# Altium PCB SENSEI_Base-Board.PcbDoc (part 1 of 10)
Units mm, origin at the board's own origin, x right, y up, seen from the top; angles counter-clockwise.
Board outline 51.6 x 28.1 mm, 8 copper layers (Top Sig/Pwr, GND1, Sig1, GND2, Sig2, Pwr, GND3, Bot Sig/Pwr), stack 1.53 mm thick; 209 components, 201 nets, 1031 pads, 2222 vias.
Unrouted connection lines stored in the file: 214.
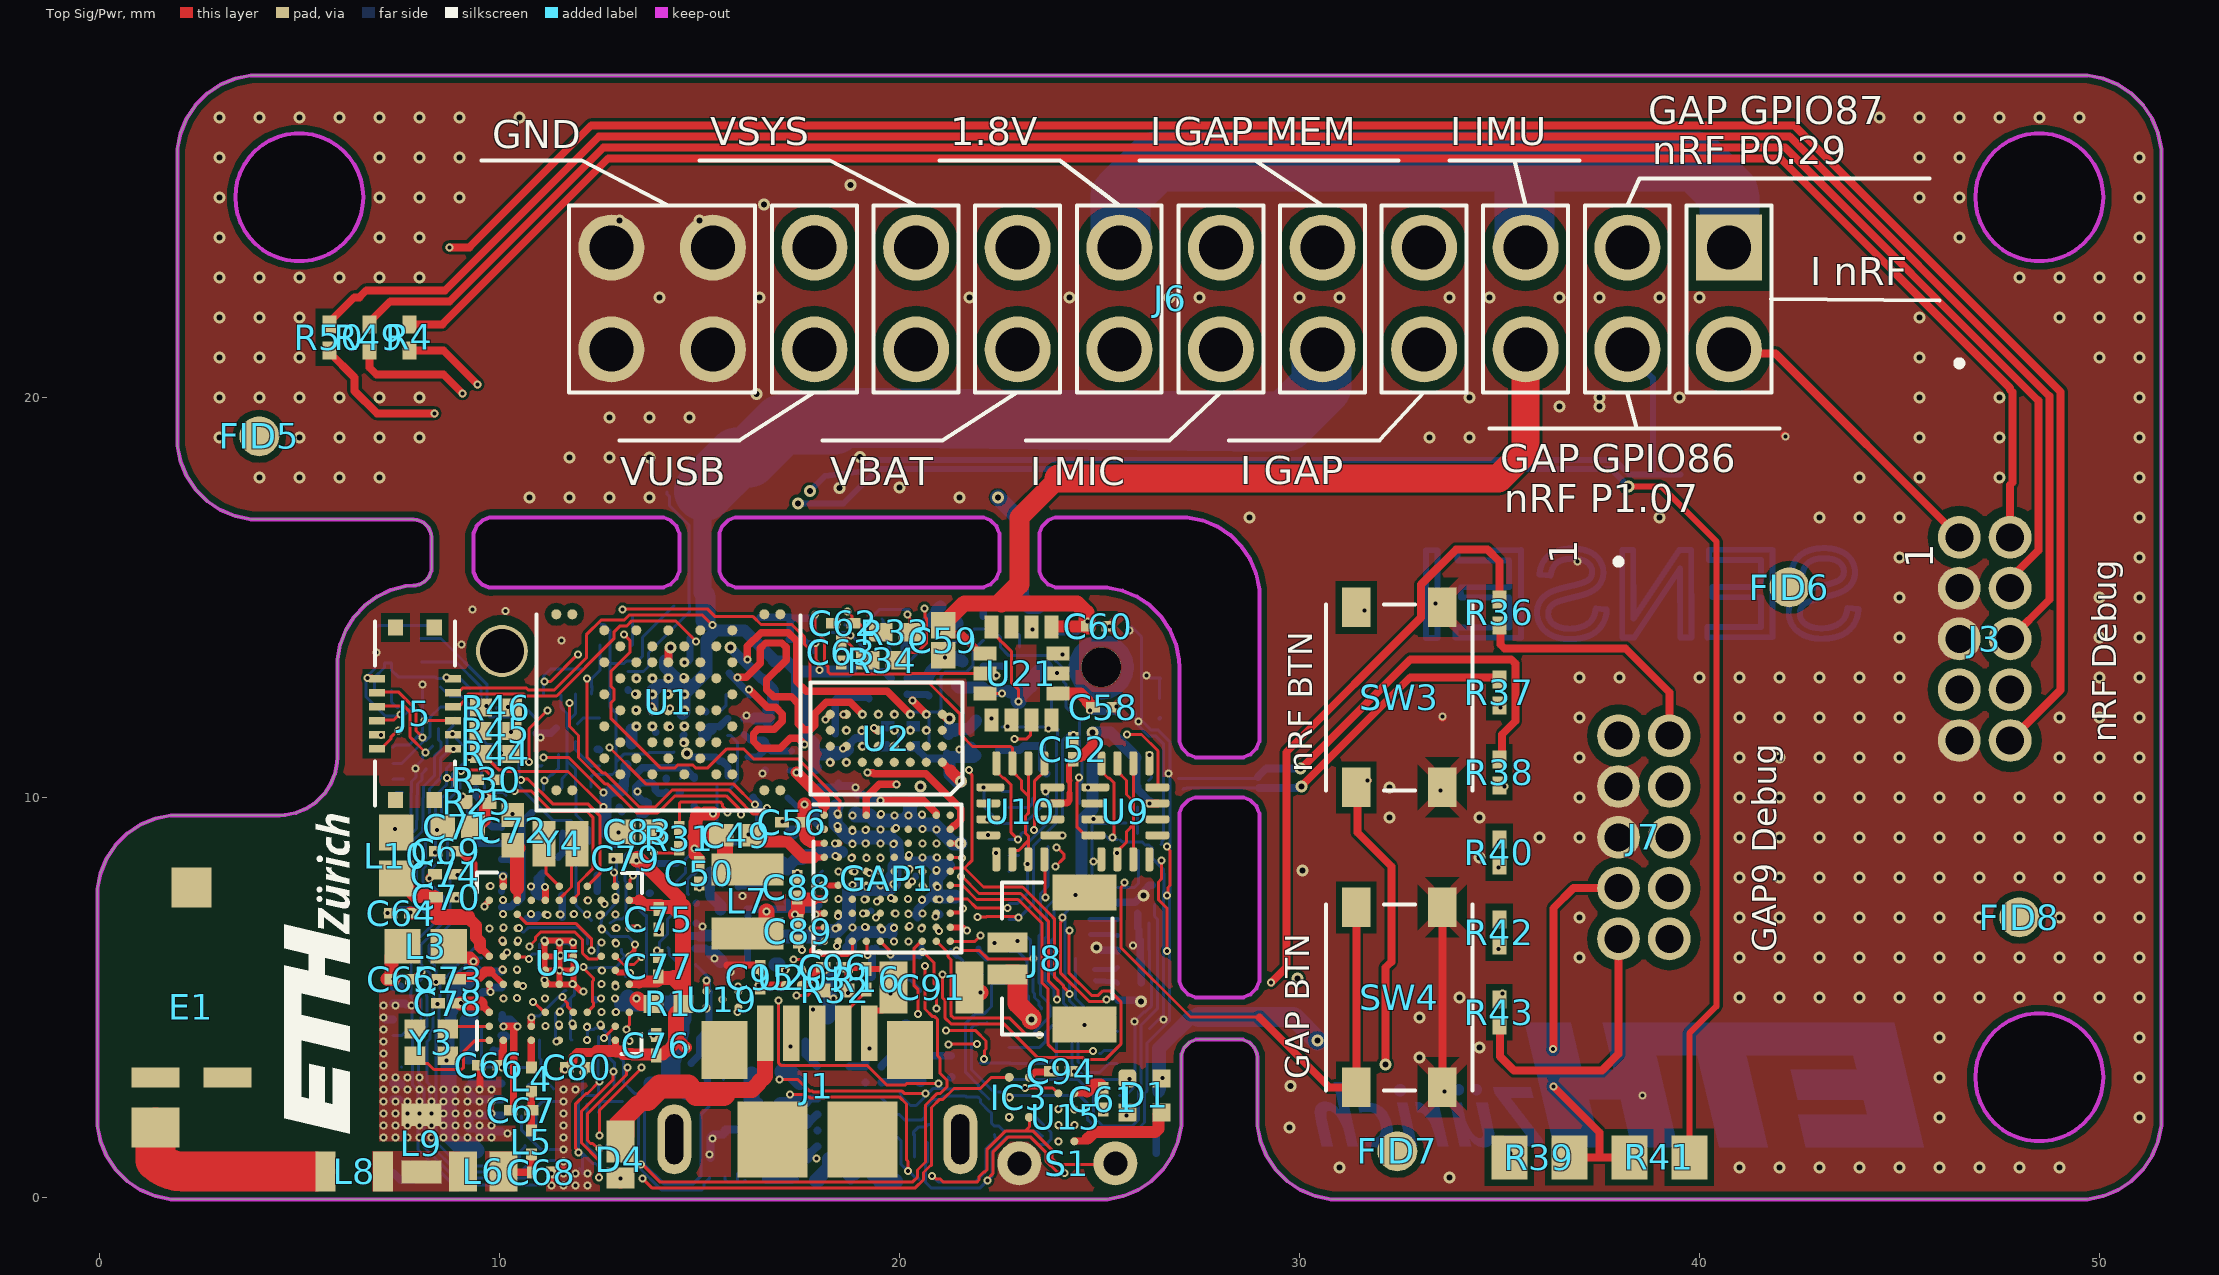
[diagram p0: Top Sig/Pwr view]
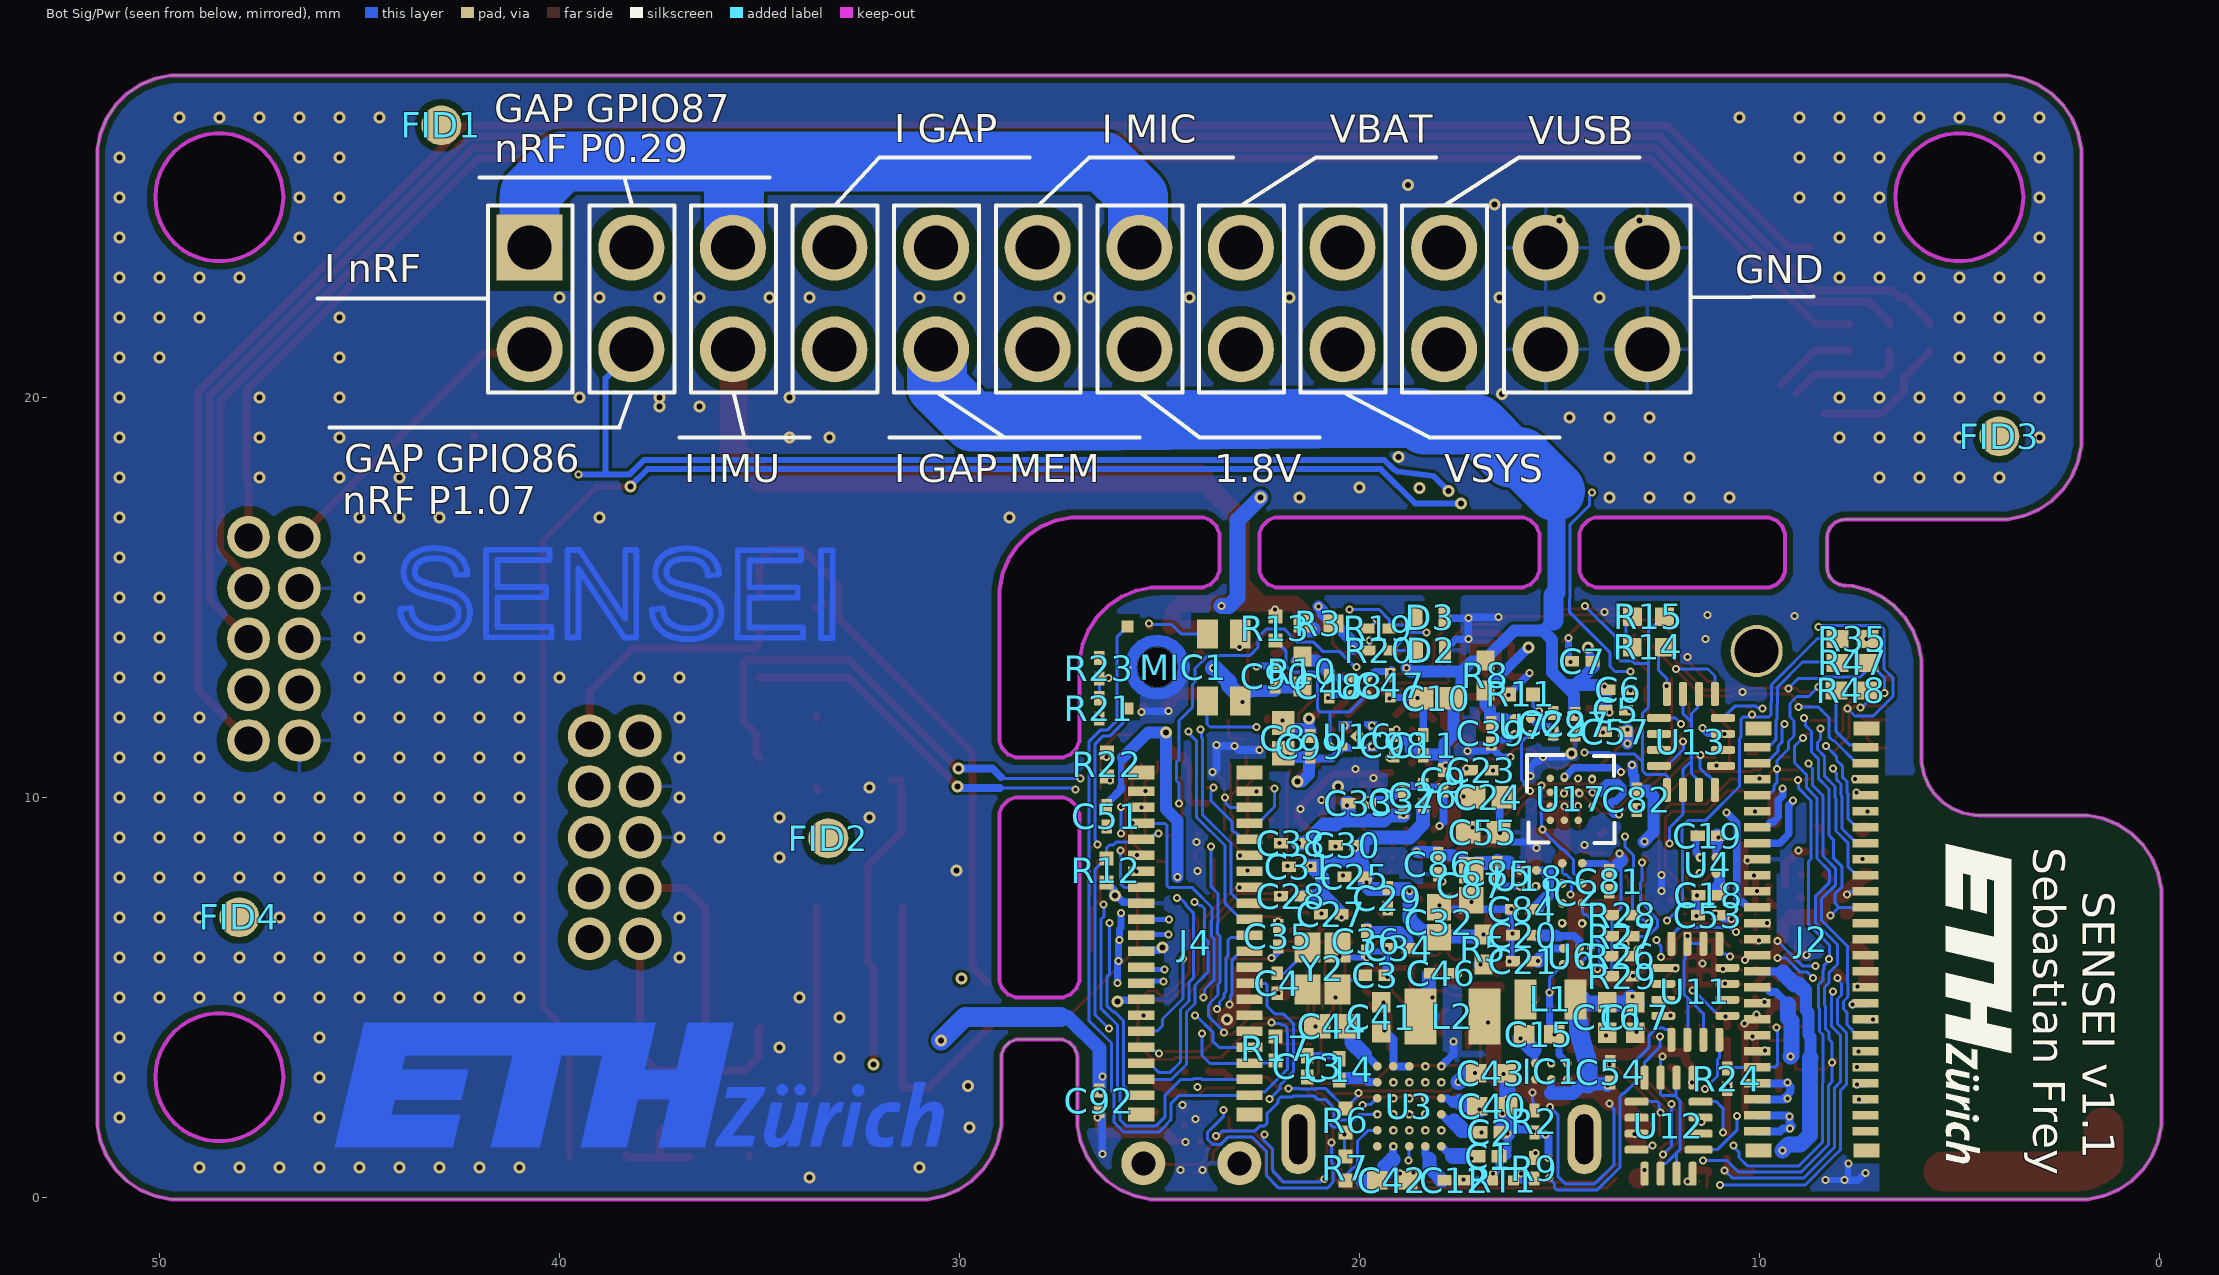
[diagram p1: Bot Sig/Pwr view, seen from below]
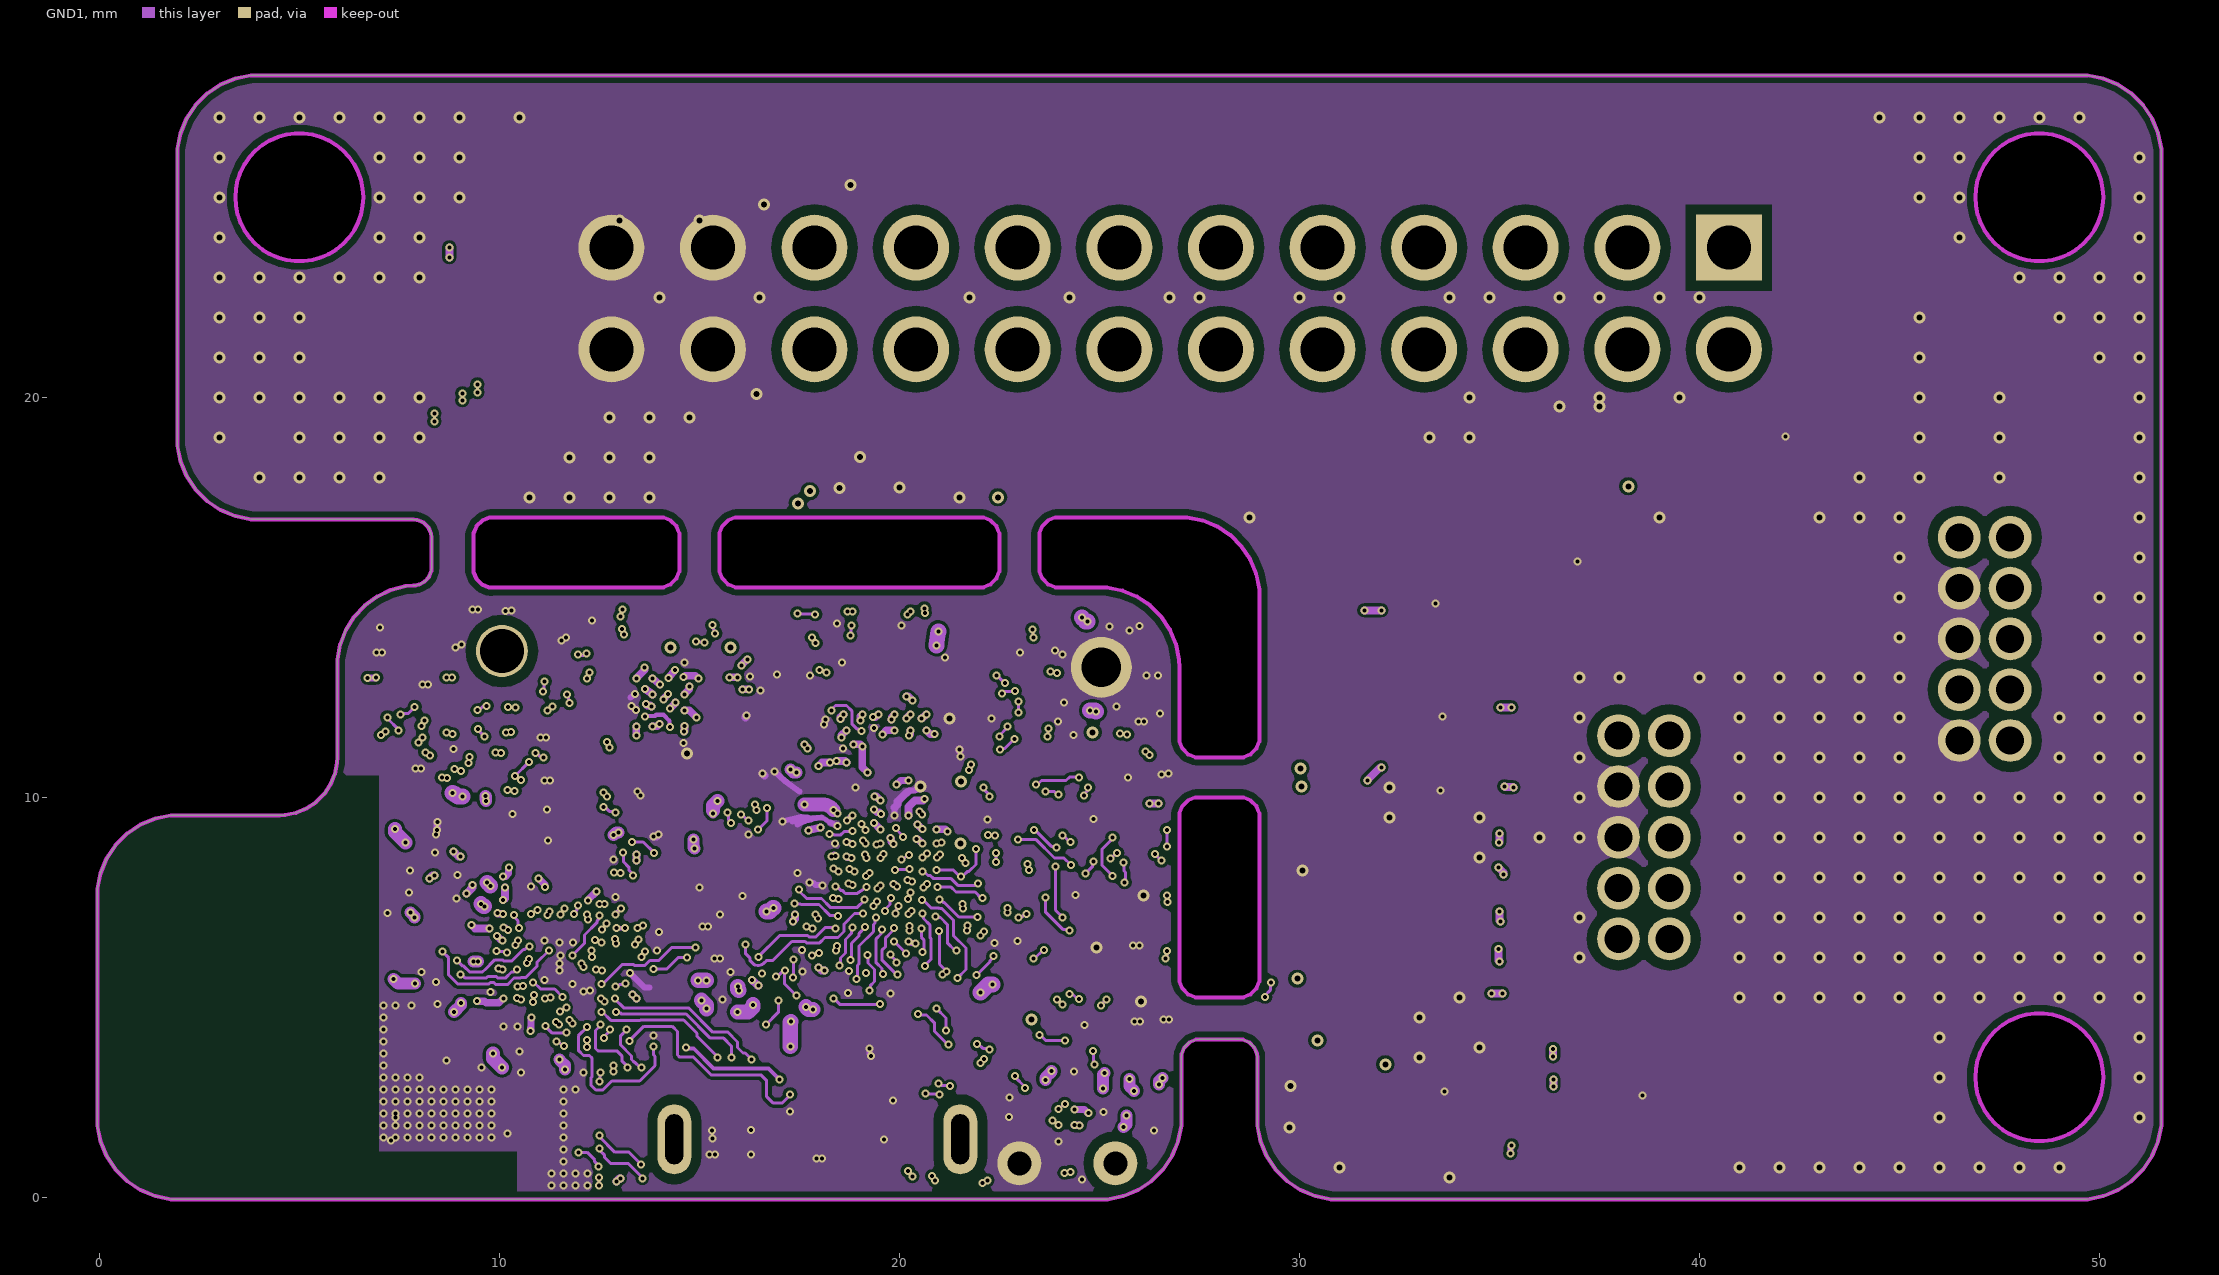
[diagram p2: GND1]
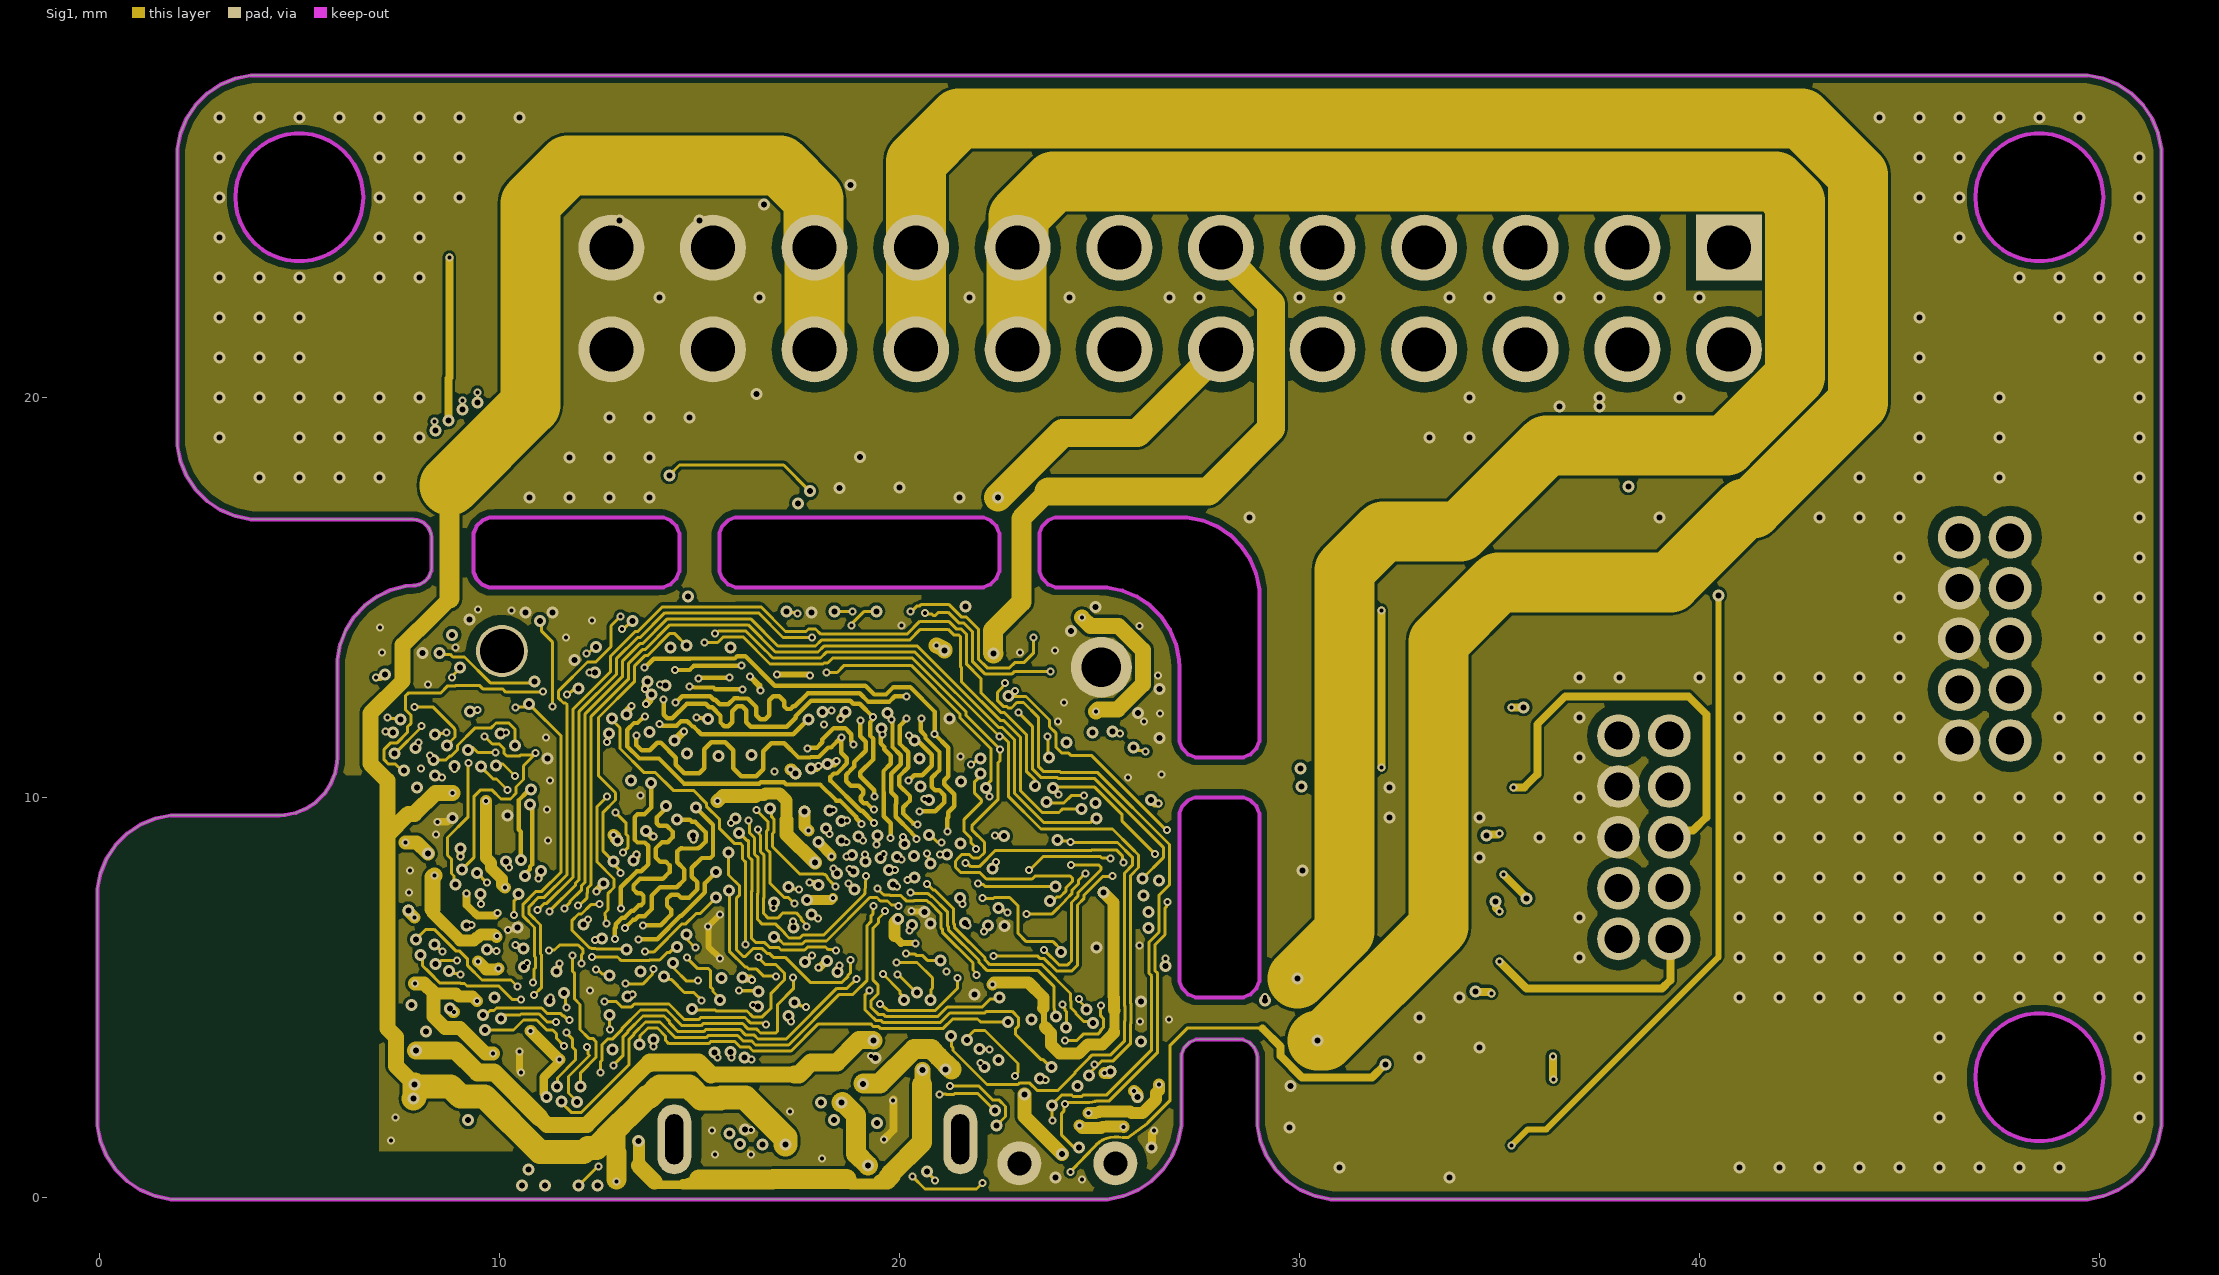
[diagram p3: Sig1]
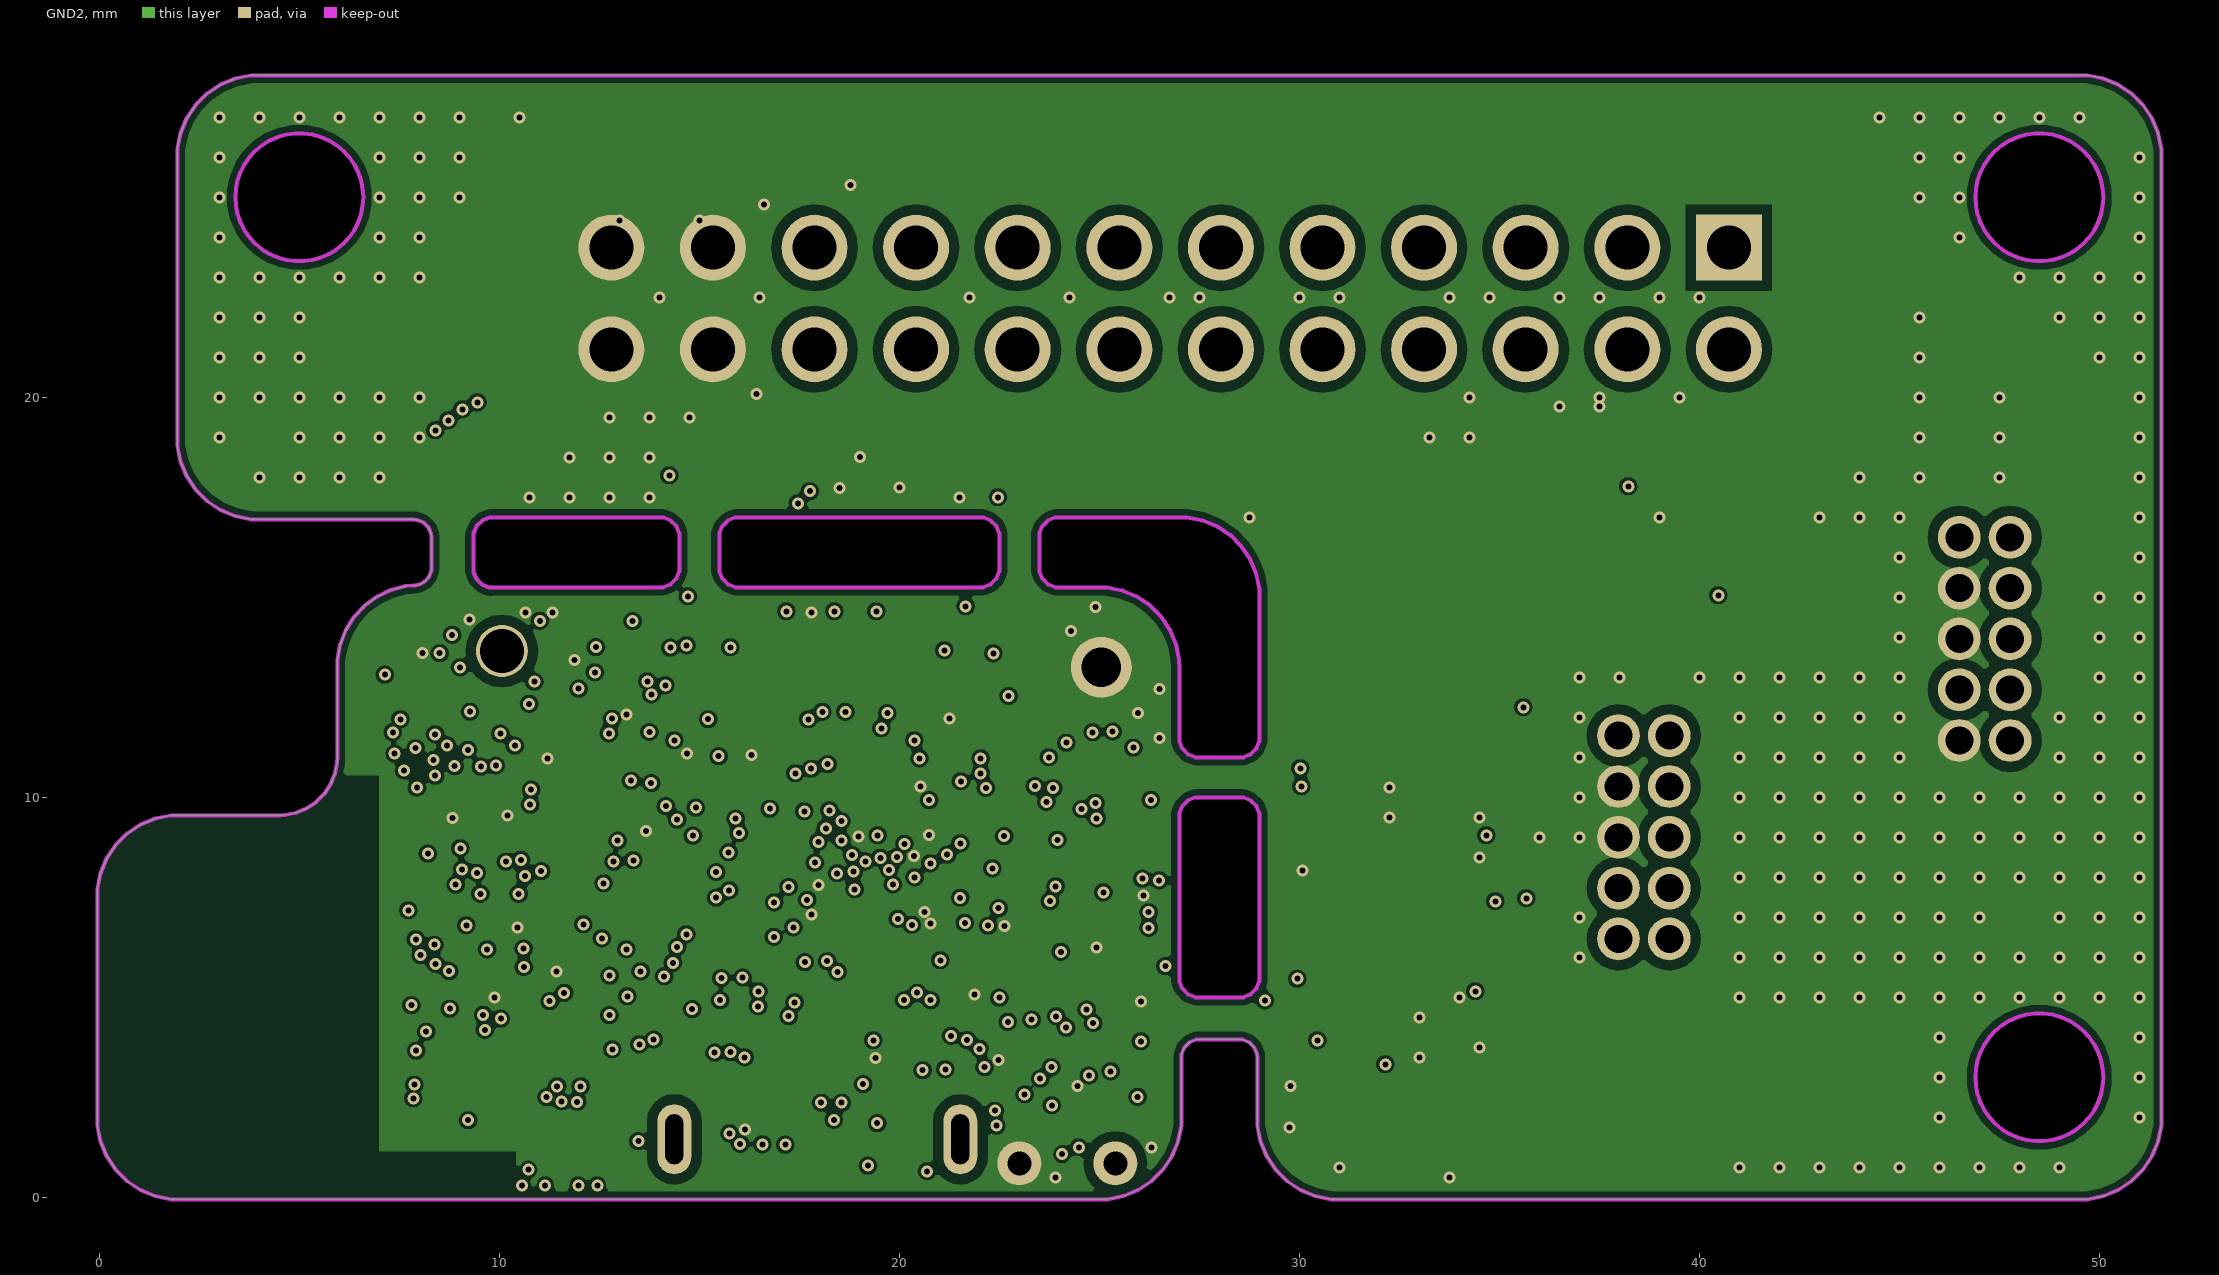
[diagram p4: GND2]
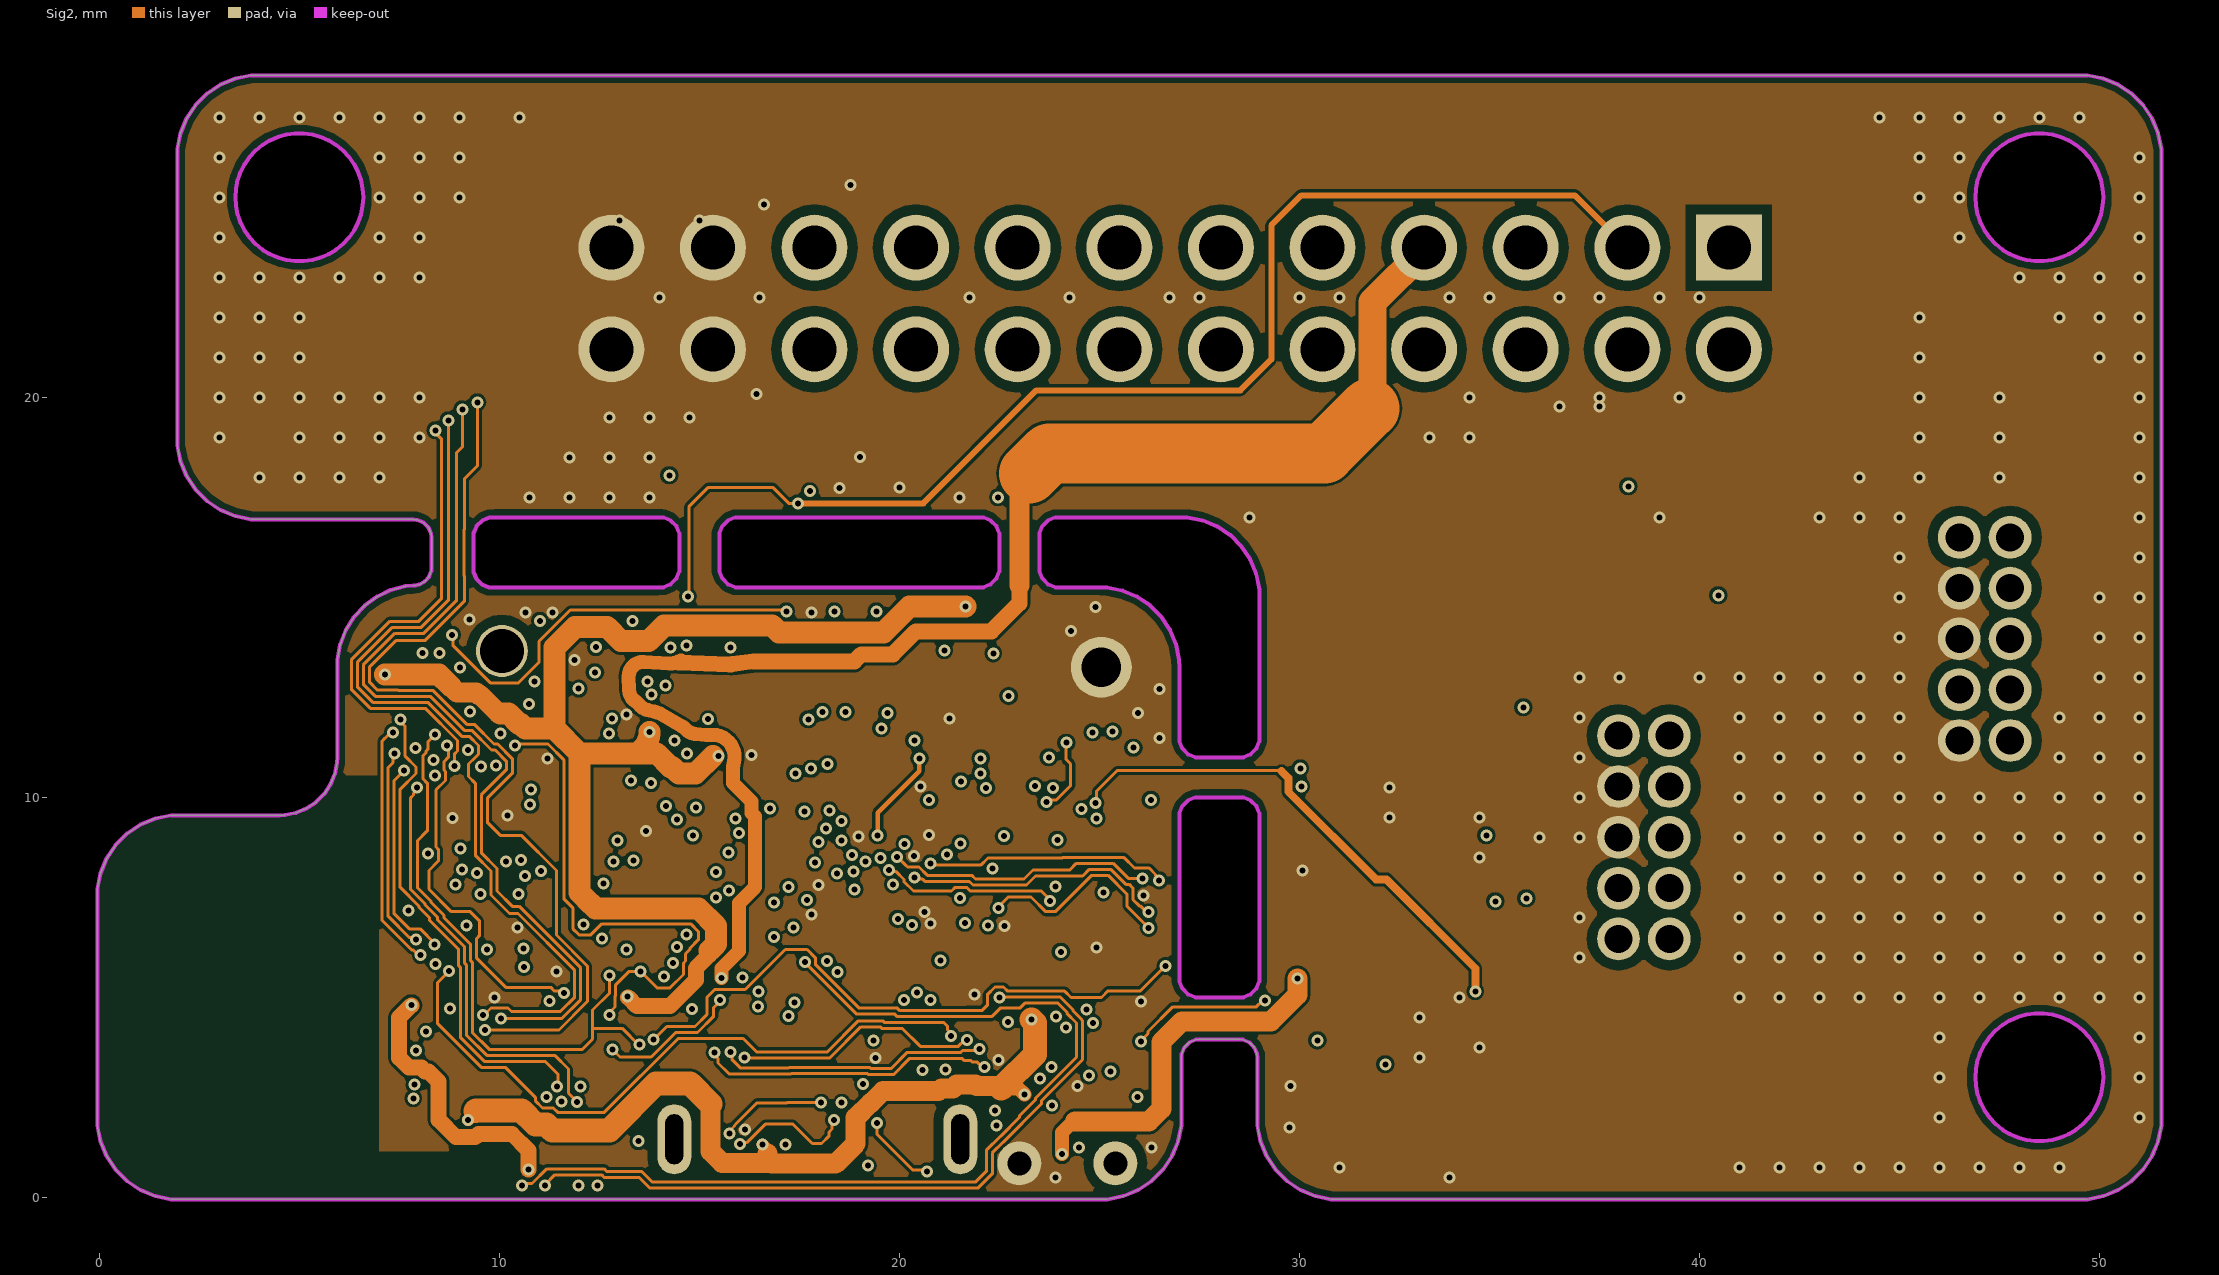
[diagram p5: Sig2]
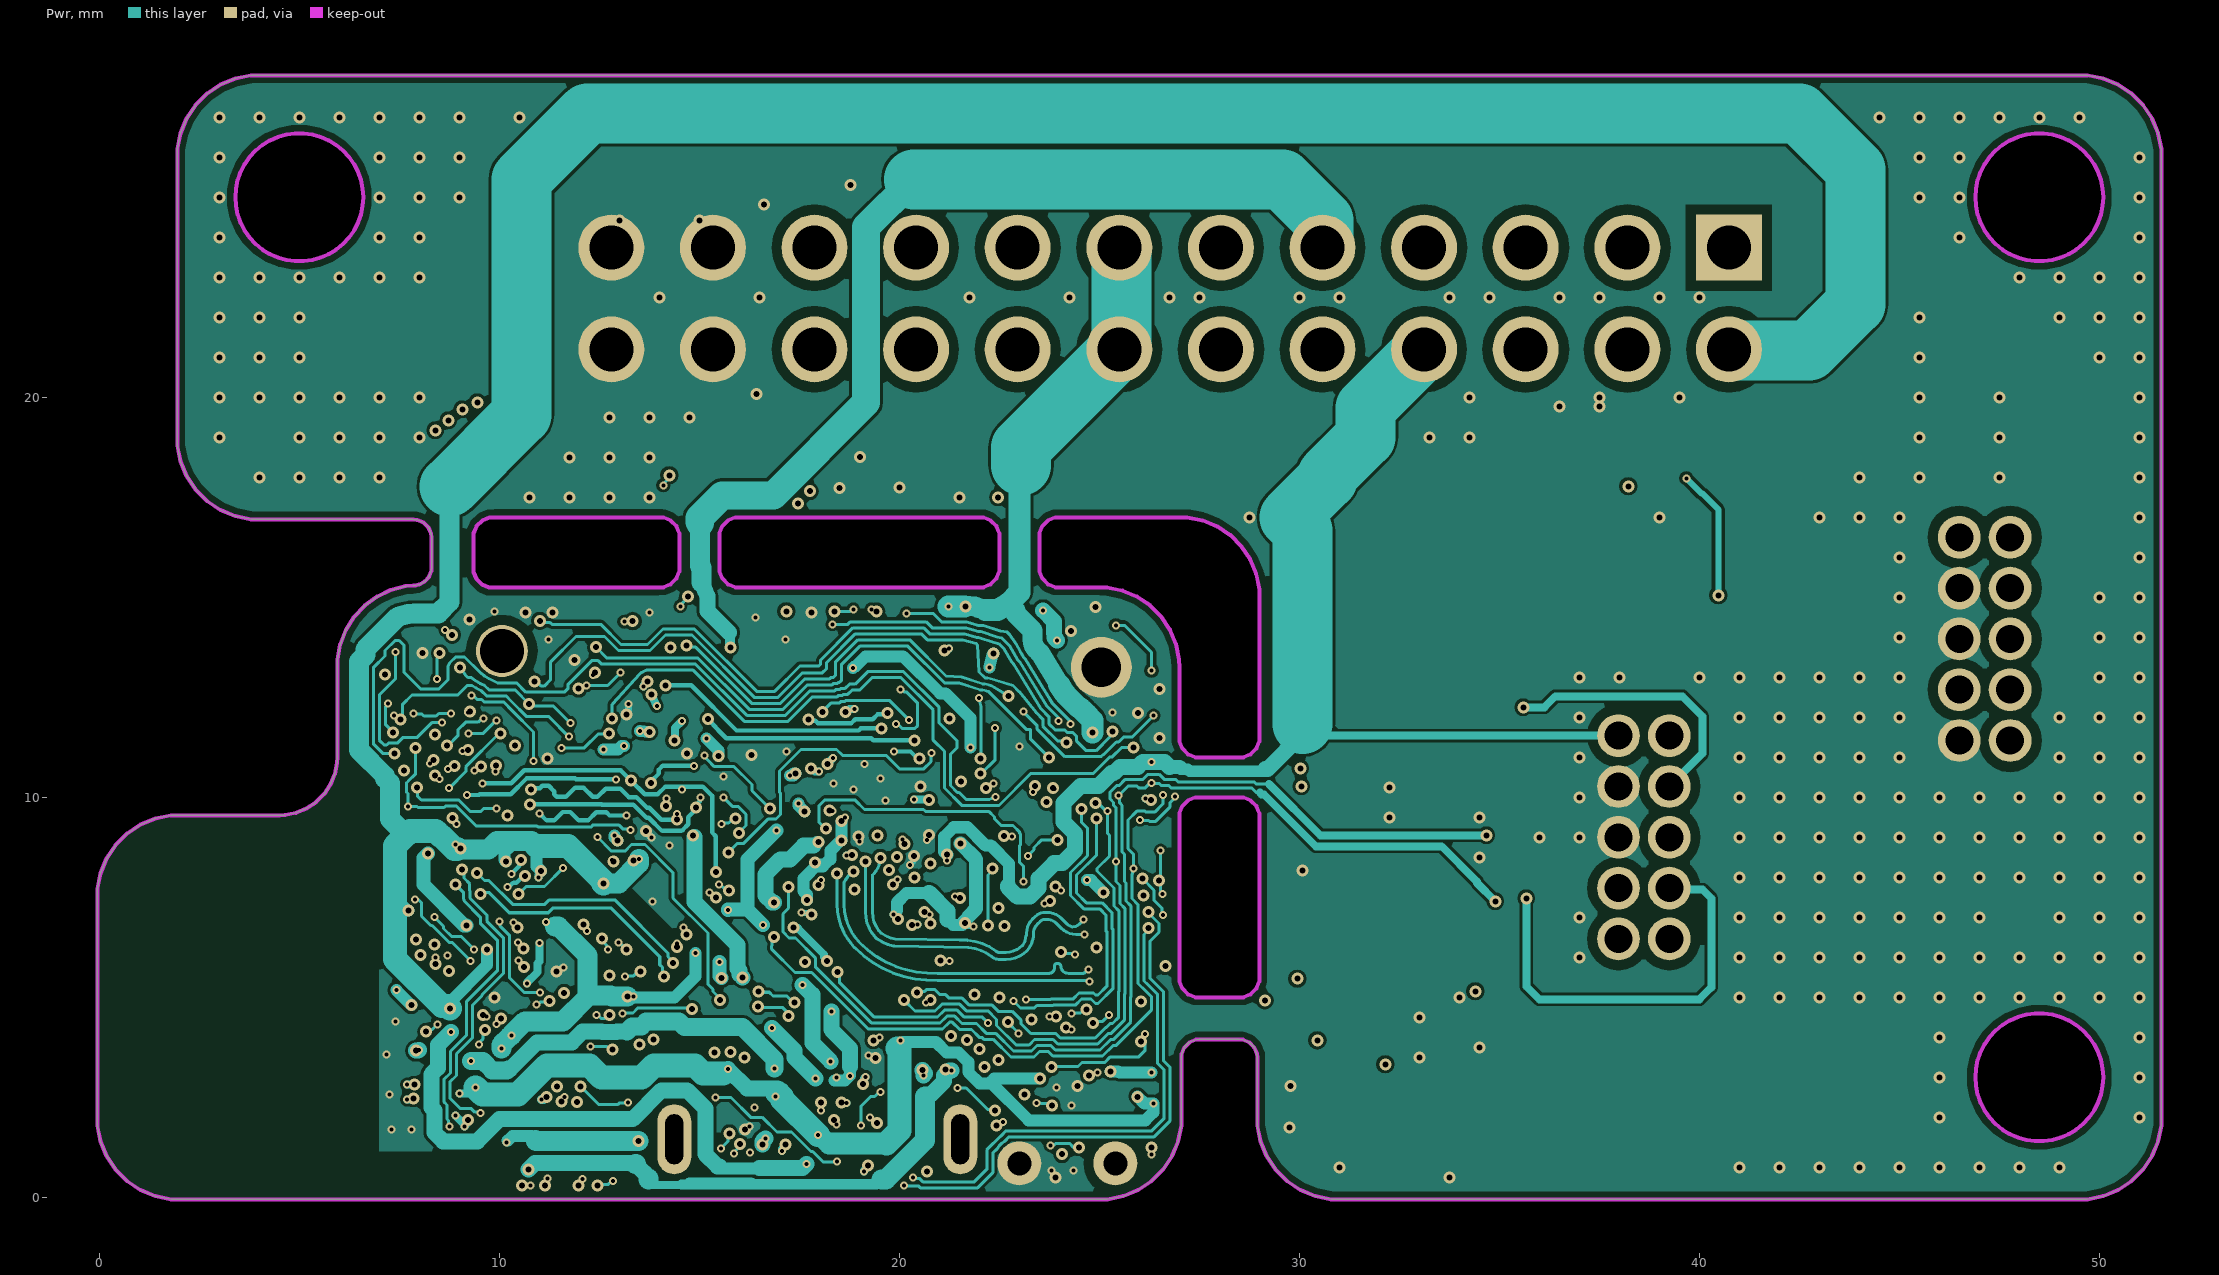
[diagram p6: Pwr]
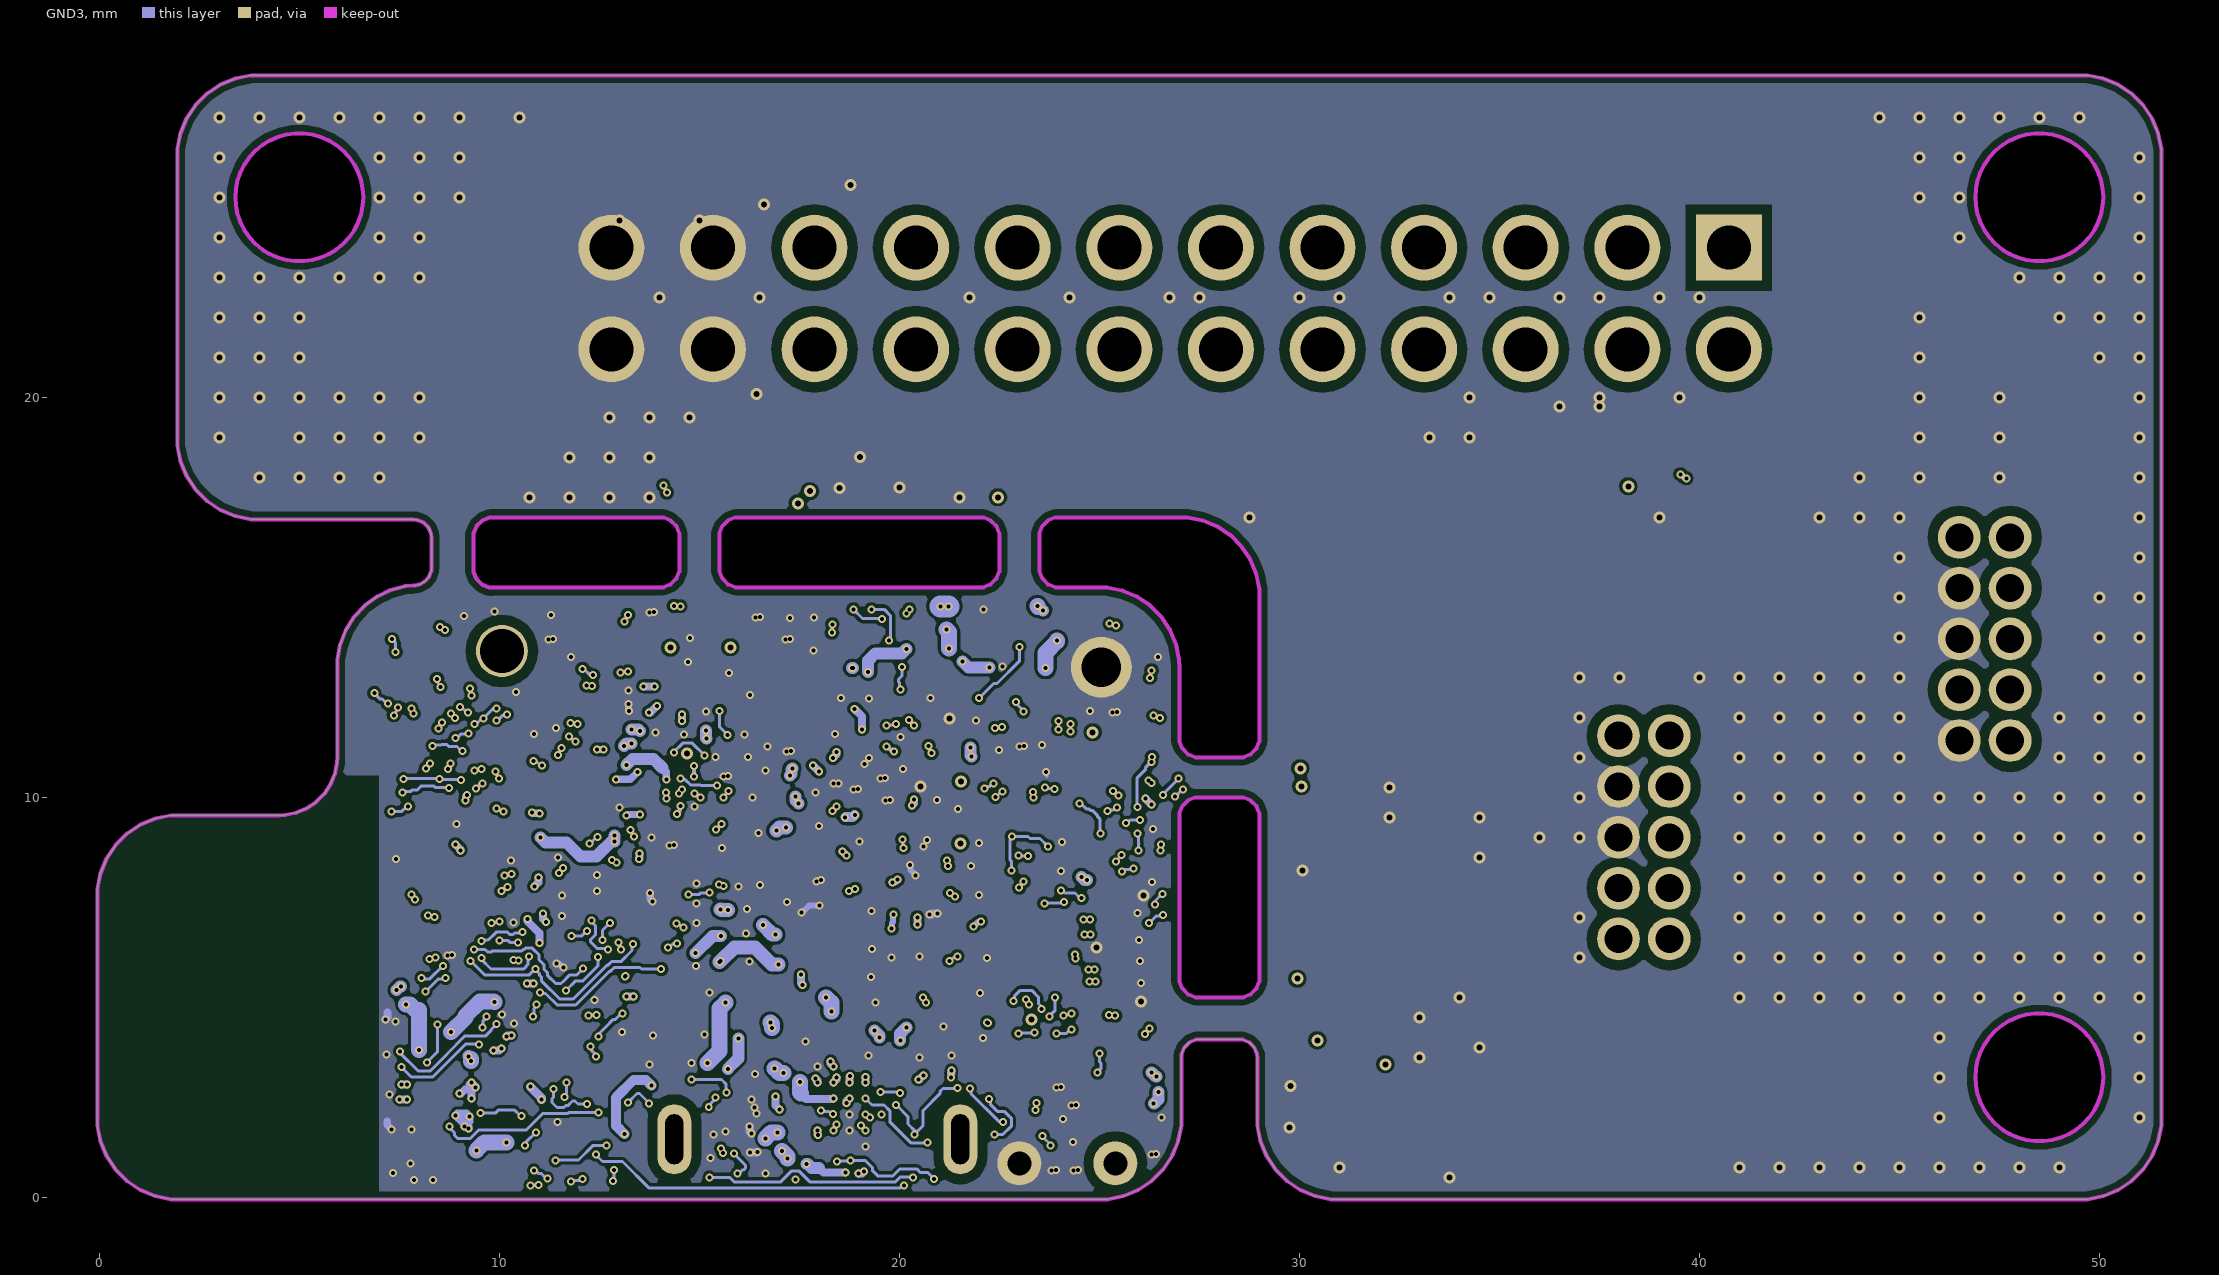
[diagram p7: GND3]

## Layer stack, top to bottom
F.Mask: solder mask 0.0102, Solder Resist, Dk 3.5
Top Sig/Pwr: signal copper 0.035
Dielectric 1: prepreg 0.11, PP-006, Dk 4.29
GND1: signal copper 0.035
Dielectric 2: prepreg 0.11, PP-006, Dk 4.29
Sig1: signal copper 0.035
Dielectric 3: core 0.35, Core-031, Dk 4.4
GND2: signal copper 0.035
Dielectric 4: prepreg 0.11, FR-4, Dk 4.29
Sig2: signal copper 0.035
Dielectric 5: core 0.35, Core-031, Dk 4.4
Pwr: signal copper 0.035
Dielectric 6: prepreg 0.11, PP-006, Dk 4.29
GND3: signal copper 0.035
Dielectric 7: prepreg 0.11, PP-006, Dk 4.29
Bot Sig/Pwr: signal copper 0.035
B.Mask: solder mask 0.0102, Solder Resist, Dk 3.5

## Board outline
0.183,1.029 0.028,1.402 -0.05,1.798 -0.05,2 -0.05,7.5 -0.05,7.702 0.028,8.098 0.183,8.471 0.407,8.807 0.693,9.093 1.029,9.317 1.402,9.472 1.798,9.55 2,9.55 2.5,9.55 4.5,9.55 4.642,9.557 4.921,9.613 5.183,9.722 5.42,9.879 5.621,10.08 5.778,10.317 5.887,10.579 5.943,10.858 5.95,11 5.95,13.442 6.021,13.821 6.162,14.179 6.367,14.505 6.629,14.787 6.939,15.015 7.286,15.182 7.658,15.281 7.85,15.295 7.908,15.298 7.988,15.315 8.133,15.39 8.242,15.511 8.3,15.664 8.307,15.745 8.307,15.75 8.307,16.495 8.299,16.583 8.232,16.745 8.107,16.869 7.945,16.936 7.858,16.945 7.836,16.95 4,16.95 3.798,16.95 3.402,17.028 3.029,17.183 2.693,17.407 2.407,17.693 2.183,18.029 2.028,18.402 1.95,18.798 1.95,19 1.95,26 1.95,26.202 2.028,26.598 2.183,26.971 2.407,27.307 2.693,27.593 3.029,27.817 3.402,27.972 3.798,28.05 4,28.05 49.5,28.05 49.702,28.05 50.098,27.972 50.471,27.817 50.807,27.593 51.093,27.307 51.317,26.971 51.472,26.598 51.55,26.202 51.55,26 51.55,2 51.55,1.798 51.472,1.402 51.317,1.029 51.093,0.693 50.807,0.407 50.471,0.183 50.098,0.028 49.702,-0.05 49.5,-0.05 31,-0.05 30.798,-0.05 30.402,0.028 30.029,0.183 29.693,0.407 29.407,0.693 29.183,1.029 29.028,1.402 28.95,1.798 28.95,2 28.95,3.5 28.941,3.588 28.874,3.75 28.75,3.874 28.588,3.941 28.5,3.95 27.5,3.95 27.412,3.941 27.25,3.874 27.126,3.75 27.059,3.588 27.05,3.5 27.05,1.999 27.05,1.798 26.971,1.402 26.817,1.028 26.592,0.693 26.307,0.407 25.971,0.183 25.598,0.028 25.202,-0.05 1.798,-0.05 1.402,0.028 1.029,0.183 0.693,0.407 0.407,0.693
cut-out: 5,23.4 cw(c5,25) 3.4,25 cw(c5,25) 5,26.6 cw(c5,25) 6.6,25 cw(c5,25)
cut-out: 48.5,23.4 cw(c48.5,25) 46.9,25 cw(c48.5,25) 48.5,26.6 cw(c48.5,25) 50.1,25 cw(c48.5,25)
cut-out: 46.9,3 ccw(c48.5,3) 48.5,1.4 ccw(c48.5,3) 50.1,3 ccw(c48.5,3) 48.5,4.6 ccw(c48.5,3)
cut-out: 27.5,5 cw(c27.5,5.5) 27,5.5 27,9.5 cw(c27.5,9.5) 27.5,10 28.5,10 cw(c28.5,9.5) 29,9.5 29,5.5 cw(c28.5,5.5) 28.5,5
cut-out: 15.576,15.467 15.5,15.651 15.5,15.75 15.5,16.5 15.5,16.599 15.576,16.783 15.717,16.924 15.901,17 16,17 22,17 22.099,17 22.283,16.924 22.424,16.783 22.5,16.599 22.5,16.5 22.5,15.75 22.5,15.651 22.424,15.467 22.283,15.326 22.099,15.25 22,15.25 16,15.25 15.901,15.25 15.717,15.326
cut-out: 25.196,15.24 25.581,15.164 25.943,15.014 26.269,14.796 26.546,14.519 26.764,14.193 26.914,13.831 26.99,13.446 27,13.25 27,11.5 27,11.401 27.076,11.217 27.217,11.076 27.401,11 28.5,11 28.599,11 28.783,11.076 28.924,11.217 29,11.401 29,11.5 29,15 29,15.197 28.923,15.583 28.772,15.947 28.554,16.275 28.275,16.553 27.947,16.772 27.583,16.923 27.197,17 27,17 24,17 23.901,17 23.717,16.924 23.576,16.783 23.5,16.599 23.5,16.5 23.5,15.75 23.5,15.651 23.576,15.467 23.717,15.326 23.901,15.25 25,15.25
cut-out: 9.431,15.454 9.358,15.63 9.358,15.726 9.358,15.75 9.358,16.495 9.358,16.595 9.434,16.778 9.574,16.919 9.758,16.995 9.858,16.995 9.858,16.994 14,16.998 14,17 14.099,17 14.283,16.924 14.424,16.783 14.5,16.599 14.5,16.5 14.5,15.75 14.5,15.651 14.424,15.467 14.283,15.326 14.099,15.25 14,15.25 9.838,15.245 9.743,15.245 9.566,15.319

## Design rules (kind name [scope] priority, off if disabled: settings)
BoardOutlineClearance [All   And  Not   OnSilkscreen] p1: gap=0.2 ignorepadtopadclearanceinfootprint=FALSE except(0.15: Text-OutlineEdge Text-CavityEdge Text-CutoutEdge Text-SplitBarrior Text-SplitContinuation)
Clearance Clearance_MEM [InNetClass('O_SPI') vs InNetClass('O_SPI')] p1: gap=0.075 ignorepadtopadclearanceinfootprint=TRUE
Clearance Clearance_HS [(OnLayer('Top Layer')) AND (InNetClass('HS_OUT')) vs (OnLayer('Top Layer')) AND (InNetClass('HS_OUT'))] p2: gap=0.09 ignorepadtopadclearanceinfootprint=TRUE except(0.18: Arc-Arc Arc-Track Track-Track)
Clearance [All] p3: gap=0.075 ignorepadtopadclearanceinfootprint=TRUE except(0: Arc-Hole Track-Hole SMDPad-Hole THPad-Hole Via-Hole Fill-Hole Poly-Hole Region-Hole Text-Hole; 0.12: SMDPad-Text; 0.15: Fill-Fill Fill-Poly Fill-Region Poly-Poly Poly-Region Region-Region; 0.16: SMDPad-Fill SMDPad-Poly SMDPad-Region; 0.2: Arc-Text Track-Text Via-Text Fill-Text Poly-Text Region-Text Text-Text; 0.25: THPad-THPad THPad-Via THPad-Fill THPad-Poly THPad-Region THPad-Text; 0.3: SMDPad-THPad)
ComponentClearance [All] p1: gap=0.2 collisioncheckmode=3 verticalgap=0.2 showdistances=FALSE
DiffPairsRouting DiffPair_CSI2_CLK [InDifferentialPair('CSI_CLK')] p1: maxlimit=0.203 minlimit=0.1 mostfreqgap=0.203 toplayer_maxgap=0.136 toplayer_prefgap=0.136 toplayer_minwidth=0.125 toplayer_maxwidth=0.125 toplayer_prefwidth=0.125 midlayer1_minwidth=0.075 midlayer1_maxwidth=0.381 midlayer1_prefwidth=0.075 midlayer2_minwidth=0.381 midlayer2_maxwidth=0.381 midlayer2_prefwidth=0.381 midlayer3_minwidth=0.381 midlayer3_maxwidth=0.381 midlayer3_prefwidth=0.381 midlayer4_minwidth=0.075 midlayer4_maxwidth=0.381 midlayer4_prefwidth=0.075 midlayer5_maxgap=0.184 midlayer5_prefgap=0.184 midlayer5_minwidth=0.075 midlayer5_maxwidth=0.075 midlayer5_prefwidth=0.075 midlayer6_maxgap=0.184 midlayer6_prefgap=0.184 midlayer6_minwidth=0.075 midlayer6_maxwidth=0.075 midlayer6_prefwidth=0.075 bottomlayer_maxgap=0.136 bottomlayer_prefgap=0.136 bottomlayer_minwidth=0.125 bottomlayer_maxwidth=0.125 bottomlayer_prefwidth=0.125 maxuncoupledlength=5
DiffPairsRouting DiffPair_CSI2_DO [InDifferentialPair('CSI_D0')] p2: maxlimit=0.203 minlimit=0.1 mostfreqgap=0.203 toplayer_maxgap=0.136 toplayer_prefgap=0.136 toplayer_minwidth=0.125 toplayer_maxwidth=0.125 toplayer_prefwidth=0.125 midlayer1_minwidth=0.075 midlayer1_maxwidth=0.381 midlayer1_prefwidth=0.381 midlayer2_minwidth=0.381 midlayer2_maxwidth=0.381 midlayer2_prefwidth=0.381 midlayer3_minwidth=0.381 midlayer3_maxwidth=0.381 midlayer3_prefwidth=0.381 midlayer4_minwidth=0.075 midlayer4_maxwidth=0.381 midlayer4_prefwidth=0.381 midlayer5_maxgap=0.184 midlayer5_prefgap=0.184 midlayer5_minwidth=0.075 midlayer5_maxwidth=0.075 midlayer5_prefwidth=0.075 midlayer6_maxgap=0.184 midlayer6_prefgap=0.184 midlayer6_minwidth=0.075 midlayer6_maxwidth=0.075 midlayer6_prefwidth=0.075 bottomlayer_maxgap=0.136 bottomlayer_prefgap=0.136 bottomlayer_minwidth=0.125 bottomlayer_maxwidth=0.125 bottomlayer_prefwidth=0.125 maxuncoupledlength=5
DiffPairsRouting DiffPair_CSI2_USB_1 [InDifferentialPair('EXTUSB')] p3: maxlimit=0.203 minlimit=0.127 mostfreqgap=0.203 toplayer_maxgap=0.127 toplayer_prefgap=0.127 toplayer_minwidth=0.156 toplayer_maxwidth=0.156 toplayer_prefwidth=0.156 midlayer5_maxgap=0.127 midlayer5_prefgap=0.127 midlayer5_minwidth=0.079 midlayer5_maxwidth=0.079 midlayer5_prefwidth=0.079 midlayer6_maxgap=0.127 midlayer6_prefgap=0.127 midlayer6_minwidth=0.079 midlayer6_maxwidth=0.079 midlayer6_prefwidth=0.079 bottomlayer_maxgap=0.127 bottomlayer_prefgap=0.127 bottomlayer_minwidth=0.156 bottomlayer_maxwidth=0.156 bottomlayer_prefwidth=0.156 impedanceprofiledriven=TRUE impedanceprofileid={DDCD8725-2C66-4836-9DB9-9B7CF1118B1B} impedanceprofilevalue=90.000000 maxuncoupledlength=5
DiffPairsRouting DiffPair_CSI2_USB_2 [InDifferentialPair('USB')] p4: maxlimit=0.203 minlimit=0.127 mostfreqgap=0.203 toplayer_maxgap=0.127 toplayer_prefgap=0.127 toplayer_minwidth=0.156 toplayer_maxwidth=0.156 toplayer_prefwidth=0.156 midlayer5_maxgap=0.127 midlayer5_prefgap=0.127 midlayer5_minwidth=0.079 midlayer5_maxwidth=0.079 midlayer5_prefwidth=0.079 midlayer6_maxgap=0.127 midlayer6_prefgap=0.127 midlayer6_minwidth=0.079 midlayer6_maxwidth=0.079 midlayer6_prefwidth=0.079 bottomlayer_maxgap=0.127 bottomlayer_prefgap=0.127 bottomlayer_minwidth=0.156 bottomlayer_maxwidth=0.156 bottomlayer_prefwidth=0.156 impedanceprofiledriven=TRUE impedanceprofileid={DDCD8725-2C66-4836-9DB9-9B7CF1118B1B} impedanceprofilevalue=90.000000 maxuncoupledlength=5
Height [All] p1: minheight=0 maxheight=27 prefheight=12.7
HoleSize [All] p1: absolutevalues=TRUE maxlimit=5 minlimit=0.1 maxpercent=80.000 minpercent=20.000
HoleToHoleClearance hole_blind_top [InDrillLayerPair('Top Sig/Pwr - GND1') vs InDrillLayerPair('Top Sig/Pwr - GND1')] p1: gap=0.2 allowstackedmicrovias=FALSE
HoleToHoleClearance hole_buried_top [InDrillLayerPair('GND1 - Sig1') vs InDrillLayerPair('GND1 - Sig1')] p2: gap=0.2 allowstackedmicrovias=FALSE
HoleToHoleClearance hole_buried_bottom [InDrillLayerPair('Pwr - GND3') vs InDrillLayerPair('Pwr - GND3')] p3: gap=0.2 allowstackedmicrovias=FALSE
HoleToHoleClearance hole_blind_bottom [InDrillLayerPair('GND3 - Bot Sig/Pwr') vs InDrillLayerPair('GND3 - Bot Sig/Pwr')] p4: gap=0.2 allowstackedmicrovias=FALSE
HoleToHoleClearance hole_buried_middle [InDrillLayerPair('GND1 - Sig1') vs InDrillLayerPair('Pwr - GND3')] p5: gap=0.3 allowstackedmicrovias=FALSE
HoleToHoleClearance hole_through_hole [InDrillLayerPair('Top Sig/Pwr - GND1') vs InDrillLayerPair('GND3 - Bot Sig/Pwr')] p6: gap=0.35 allowstackedmicrovias=FALSE
MatchedLengths [InNetClass('MEMORIES')] p1: tolerance=1 checknetsindiffpair=FALSE checkdiffpairvsdiffpair=TRUE checkxsignals=TRUE checkothers=TRUE
MatchedLengths MatchedLengths_HSOUT [InNetClass('HS_ML')] p2: tolerance=0.2 checknetsindiffpair=FALSE checkdiffpairvsdiffpair=TRUE checkxsignals=TRUE checkothers=TRUE
MatchedLengths MatchedLengths_HSIN [InNetClass('HS_ML2')] p3: tolerance=0.2 checknetsindiffpair=FALSE checkdiffpairvsdiffpair=TRUE checkxsignals=TRUE checkothers=TRUE
MatchedLengths MatchedLengths_MEMS_PP1 [InxSignalClass('MEMS_PP1')] p4: tolerance=0.1 checknetsindiffpair=FALSE checkdiffpairvsdiffpair=TRUE checkxsignals=TRUE checkothers=TRUE
MatchedLengths MatchedLengths_MEMS_PP2 [InxSignalClass('MEMS_PP2')] p5: tolerance=0.1 checknetsindiffpair=FALSE checkdiffpairvsdiffpair=TRUE checkxsignals=TRUE checkothers=TRUE
MatchedLengths MatchedLengths-diff_1 [InNetClass('CSI2')] p6: tolerance=0.01 checknetsindiffpair=FALSE checkdiffpairvsdiffpair=TRUE checkxsignals=TRUE checkothers=TRUE
MinimumSolderMaskSliver [All] p1: minsoldermaskwidth=0.1
PlaneClearance [All] p1: clearance=0.1
PolygonConnect PolygonConnect_11 [HasFootprint('FP-LQW18AN_80-MFG')] p1: thpad.connectstyle=Relief thpad.reliefconductorwidth=0.254 thpad.reliefentries=4 thpad.polygonreliefangle="90 Angle" thpad.airgapwidth=0.254 smdpad.connectstyle=Direct smdpad.reliefconductorwidth=0.254 smdpad.reliefentries=4 smdpad.polygonreliefangle="90 Angle" smdpad.airgapwidth=0.254 via.connectstyle=Relief via.reliefconductorwidth=0.254 via.reliefentries=4 via.polygonreliefangle="90 Angle" via.airgapwidth=0.254
PolygonConnect PolygonConnect_10 [InNet('NetE1_1')] p2: thpad.connectstyle=Relief thpad.reliefconductorwidth=0.254 thpad.reliefentries=4 thpad.polygonreliefangle="90 Angle" thpad.airgapwidth=0.254 smdpad.connectstyle=Direct smdpad.reliefconductorwidth=0.254 smdpad.reliefentries=4 smdpad.polygonreliefangle="90 Angle" smdpad.airgapwidth=0.254 via.connectstyle=Relief via.reliefconductorwidth=0.254 via.reliefentries=4 via.polygonreliefangle="90 Angle" via.airgapwidth=0.254
PolygonConnect PolygonConnect_9 [HasFootprint('FP-LQW15AN_80-MFG')] p3: thpad.connectstyle=Direct thpad.reliefconductorwidth=0.254 thpad.reliefentries=4 thpad.polygonreliefangle="90 Angle" thpad.airgapwidth=0.254 smdpad.connectstyle=Direct smdpad.reliefconductorwidth=0.254 smdpad.reliefentries=4 smdpad.polygonreliefangle="90 Angle" smdpad.airgapwidth=0.254 via.connectstyle=Relief via.reliefconductorwidth=0.254 via.reliefentries=4 via.polygonreliefangle="90 Angle" via.airgapwidth=0.254
PolygonConnect PolygonConnect_8 [HasFootprint('FP-GRM033-0_03-MFG')] p4: thpad.connectstyle=Relief thpad.reliefconductorwidth=0.254 thpad.reliefentries=4 thpad.polygonreliefangle="90 Angle" thpad.airgapwidth=0.254 smdpad.connectstyle=Direct smdpad.reliefconductorwidth=0.254 smdpad.reliefentries=4 smdpad.polygonreliefangle="90 Angle" smdpad.airgapwidth=0.254 via.connectstyle=Direct via.reliefconductorwidth=0.254 via.reliefentries=4 via.polygonreliefangle="90 Angle" via.airgapwidth=0.254
PolygonConnect PolygonConnect_7 [HasFootprint('U.FL-R-SMT-1(01)_GND_pad_small')] p5: thpad.connectstyle=Relief thpad.reliefconductorwidth=0.254 thpad.reliefentries=4 thpad.polygonreliefangle="90 Angle" thpad.airgapwidth=0.254 smdpad.connectstyle=Direct smdpad.reliefconductorwidth=0.254 smdpad.reliefentries=4 smdpad.polygonreliefangle="90 Angle" smdpad.airgapwidth=0.254 via.connectstyle=Direct via.reliefconductorwidth=0.254 via.reliefentries=4 via.polygonreliefangle="90 Angle" via.airgapwidth=0.254
PolygonConnect PolygonConnect_6 [InNet('NetL6_2')] p6: thpad.connectstyle=Relief thpad.reliefconductorwidth=0.254 thpad.reliefentries=4 thpad.polygonreliefangle="90 Angle" thpad.airgapwidth=0.254 smdpad.connectstyle=Direct smdpad.reliefconductorwidth=0.254 smdpad.reliefentries=4 smdpad.polygonreliefangle="90 Angle" smdpad.airgapwidth=0.254 via.connectstyle=Relief via.reliefconductorwidth=0.254 via.reliefentries=4 via.polygonreliefangle="90 Angle" via.airgapwidth=0.254
PolygonConnect PolygonConnect_5 [InNet('NetC68_1')] p7: thpad.connectstyle=Relief thpad.reliefconductorwidth=0.254 thpad.reliefentries=4 thpad.polygonreliefangle="90 Angle" thpad.airgapwidth=0.254 smdpad.connectstyle=Direct smdpad.reliefconductorwidth=0.254 smdpad.reliefentries=4 smdpad.polygonreliefangle="90 Angle" smdpad.airgapwidth=0.254 via.connectstyle=Relief via.reliefconductorwidth=0.254 via.reliefentries=4 via.polygonreliefangle="90 Angle" via.airgapwidth=0.254
PolygonConnect PolygonConnect_4 [All vs IsNamedPolygon('GND_L08_P025')] p8: thpad.connectstyle=Relief thpad.reliefconductorwidth=0.1 thpad.reliefentries=4 thpad.polygonreliefangle="90 Angle" thpad.airgapwidth=0.254 smdpad.connectstyle=Relief smdpad.reliefconductorwidth=0.1 smdpad.reliefentries=4 smdpad.polygonreliefangle="90 Angle" smdpad.airgapwidth=0.254 via.connectstyle=Direct via.reliefconductorwidth=0.254 via.reliefentries=4 via.polygonreliefangle="90 Angle" via.airgapwidth=0.254
PolygonConnect PolygonConnect_3 [All vs IsNamedPolygon('GND_L08_P025')] p9: thpad.connectstyle=Relief thpad.reliefconductorwidth=0.1 thpad.reliefentries=4 thpad.polygonreliefangle="90 Angle" thpad.airgapwidth=0.254 smdpad.connectstyle=Relief smdpad.reliefconductorwidth=0.254 smdpad.reliefentries=4 smdpad.polygonreliefangle="90 Angle" smdpad.airgapwidth=0.254 via.connectstyle=Relief via.reliefconductorwidth=0.254 via.reliefentries=4 via.polygonreliefangle="90 Angle" via.airgapwidth=0.254
PolygonConnect [Not(OnBottomLayer Or OnTopLayer)] p10: connectstyle=Direct reliefconductorwidth=0.254 reliefentries=4 polygonreliefangle="45 Angle" airgapwidth=0.254
PolygonConnect PolygonConnect_1 [OnBottomLayer] p11: connectstyle=Relief reliefconductorwidth=0.254 reliefentries=4 polygonreliefangle="45 Angle" airgapwidth=0.254
PolygonConnect PolygonConnect_2 [OnTopLayer] p12: connectstyle=Relief reliefconductorwidth=0.254 reliefentries=4 polygonreliefangle="45 Angle" airgapwidth=0.254
RoutingVias via_through_hole [InDrillLayerPair('Top Sig/Pwr - Bot Sig/Pwr')] p1: holewidth=0.15 width=0.3 viastyle="Through Hole" minholewidth=0.15 minwidth=0.3 maxholewidth=0.15 maxwidth=0.3
RoutingVias via_blind_top [InDrillLayerPair('Top Sig/Pwr - GND1')] p2: holewidth=0.1 width=0.2 viastyle="Through Hole" minholewidth=0.1 minwidth=0.2 maxholewidth=0.1 maxwidth=0.2
RoutingVias via_buried_1 [InDrillLayerPair('GND1 - Sig1')] p3: holewidth=0.1 width=0.2 viastyle="Through Hole" minholewidth=0.1 minwidth=0.2 maxholewidth=0.1 maxwidth=0.2
RoutingVias via_buried_middle [InDrillLayerPair('Sig1 - Pwr')] p4: holewidth=0.15 width=0.3 viastyle="Through Hole" minholewidth=0.15 minwidth=0.3 maxholewidth=0.15 maxwidth=0.3
RoutingVias via_buried_2 [InDrillLayerPair('Pwr - GND3')] p5: holewidth=0.1 width=0.2 viastyle="Through Hole" minholewidth=0.1 minwidth=0.2 maxholewidth=0.1 maxwidth=0.2
RoutingVias via_blind_bottom [InDrillLayerPair('GND3 - Bot Sig/Pwr')] p6: holewidth=0.1 width=0.2 viastyle="Through Hole" minholewidth=0.1 minwidth=0.2 maxholewidth=0.1 maxwidth=0.2
SilkToSilkClearance [All] p1: silktosilkclearance=0.1
SilkToSolderMaskClearance [IsPad] p1: minsilkscreentomaskgap=0.1 clearancetoexposedcopper=TRUE
SolderMaskExpansion SolderMaskExpansion_VIA [IsVia] p1: expansion=-0.1 istentingtop=FALSE useseparateexpansions=TRUE expansionbottom=-0.1 istentingbottom=FALSE
SolderMaskExpansion SolderMaskExpansion_1 [All] p2: expansion=0.05 istentingtop=FALSE
ViasUnderSMD [All] p1: allowed=TRUE
Width Width_1 [All] p1: maxlimit=6 minlimit=0.075 preferedwidth=0.075
Width width_50ohm_OSPI [InNetClass('O_SPI')] p2: maxlimit=0.185 minlimit=0.111 preferedwidth=0.185 toplayer_minwidth=0.185 toplayer_prefwidth=0.185 midlayer5_maxwidth=0.111 midlayer5_prefwidth=0.111 midlayer6_maxwidth=0.111 midlayer6_prefwidth=0.111 bottomlayer_minwidth=0.185 bottomlayer_prefwidth=0.185 impedanceprofiledriven=TRUE impedanceprofileid={85A6859E-D439-4C70-89F7-B2343958C511} impedanceprofilevalue=50.000000 minimp=50.000000 maximp=50.000000 favimp=50.000000
Width width_50ohm_QSPI [InNetClass('Q_SPI')] p3: maxlimit=0.185 minlimit=0.111 preferedwidth=0.185 toplayer_minwidth=0.185 toplayer_prefwidth=0.185 midlayer5_maxwidth=0.111 midlayer5_prefwidth=0.111 midlayer6_maxwidth=0.111 midlayer6_prefwidth=0.111 bottomlayer_minwidth=0.185 bottomlayer_prefwidth=0.185 impedanceprofiledriven=TRUE impedanceprofileid={85A6859E-D439-4C70-89F7-B2343958C511} impedanceprofilevalue=50.000000 minimp=50.000000 maximp=50.000000 favimp=50.000000
Width width_50ohm_antenna [InNetClass('50OHM')] p4: maxlimit=0.185 minlimit=0.111 preferedwidth=0.185 toplayer_minwidth=0.185 toplayer_prefwidth=0.185 midlayer5_maxwidth=0.111 midlayer5_prefwidth=0.111 midlayer6_maxwidth=0.111 midlayer6_prefwidth=0.111 bottomlayer_minwidth=0.185 bottomlayer_prefwidth=0.185 impedanceprofiledriven=TRUE impedanceprofileid={85A6859E-D439-4C70-89F7-B2343958C511} impedanceprofilevalue=50.000000 minimp=50.000000 maximp=50.000000 favimp=50.000000
Width Width_100Ohms_1 [InNetClass('CSI2xxx')] p5: maxlimit=0.1 minlimit=0.094 preferedwidth=0.094 toplayer_maxwidth=0.094 midlayer1_minwidth=0.094 midlayer2_minwidth=0.094 midlayer3_minwidth=0.094 midlayer4_minwidth=0.094 midlayer5_minwidth=0.1 midlayer5_prefwidth=0.1 midlayer6_minwidth=0.1 midlayer6_prefwidth=0.1 bottomlayer_minwidth=0.094 bottomlayer_maxwidth=0.094 minimp=50.000000 maximp=50.000000 favimp=50.000000
21 further rules are at their usual default settings.

## Classes and differential pairs
net class Q_SPI: nRF_QSPI_CLK nRF_QSPI_IO0 nRF_QSPI_IO1 nRF_QSPI_IO2 nRF_QSPI_IO3
net class CSI2_DATA: CSI_D0_N CSI_D0_P
net class CSI2_CLK: CSI_CLK_N CSI_CLK_P
net class 50OHM: GND NetC67_1 NetC68_1 NetE1_1 NetL4_1 NetL6_2
component class 11_BREAK_OFF: FID1 FID2 FID3 FID4 FID5 FID6 FID7 FID8 J3 J6 J7 R4 R36 R37 R38 R39 R40 R41 R42 R43 R49 R50 SW3 SW4
component class 09_SHARED_PERIPHERAL: C58 C59 C60 C61 C62 C63 C92 D1 D2 D3 R19 R20 R33 R34 U15 U21
component class 08_nRF_RAM: C82 C83 R31 U17
component class 05_GAP_MIC: C90 MIC1 R17 R21 R23
component class 07_nRF_GPIO: C81 IC2 R26 R27 R28 R29 R30 Y4
component class 04_GAP_GPIO: C51 C52 C53 C54 C57 R14 R15 U9 U10 U11 U12 U13
component class 10_CONNECTOR: D4 J1 J2 J4 J5 J8 R16 R35 R44 R45 R46 R47 R48 U19
component class 06_nRF_POWER_SWD_RF: C64 C65 C66 C67 C68 C69 C70 C71 C72 C73 C74 C75 C76 C77 C78 C79 C80 E1 L3 L4 L5 L6 L8 L9 L10 R24 R25 U5 Y3
component class 02_GAP_JTAG_XTALs: C3 C4 R22 Y2
net class O_SPI: OSPI_0 OSPI_1 OSPI_2 OSPI_3 OSPI_4 OSPI_5 OSPI_6 OSPI_7 OSPI_CLK OSPI_DS
component class 03_GAP_MEM: C5 C6 C7 C8 C9 C10 C11 C97 C98 C99 R12 U1 U2 U16
component class 01_GAP_POWER: C23 C24 C25 C26 C27 C28 C29 C30 C31 C32 C33 C34 C35 C36 C37 C38 C49 C50 C55 C56 C86 C87 C88 C89 GAP1 L7
component class 00_POWER: C1 C2 C12 C13 C14 C15 C16 C17 C18 C19 C20 C21 C22 C39 C40 C41 C42 C43 C44 C46 C47 C48 C84 C85 C91 C94 C95 C96 IC1 IC3 L1 L2 R1 R2 R3 R5 R6 R7 R8 R9 R10 R11 R13 R32 RT1 S1 U3 U4 U6 U7 U8 U18 U20
differential pair EXTUSB: +EXTUSB_P -EXTUSB_N
differential pair CSI_D0: +CSI_D0_P -CSI_D0_N
differential pair CSI_CLK: +CSI_CLK_P -CSI_CLK_N
differential pair USB: +USB_P -USB_N

## Components (designator, comment, footprint, x,y, rotation, side; value= is the part's Value field where it differs from the comment)
C1 "GRM035R60J475ME15D" FP-GRM035-0_09-IPC_C 16.775,1.025 r180 bottom
C2 "GRM035R60J475ME15D" FP-GRM035-0_09-IPC_C 16.725,1.625 r180 bottom
C3 "CBR02C200F5GAC" CAPC6333_33N_KEM-L 19.6,5.55 r180 bottom
C4 "CBR02C200F5GAC" CAPC6333_33N_KEM-L 22.05,5.35 r270 bottom
C5 "CL03A105KP3NSNC" FP-CL03-IPC_C 13.587,12.18 r180 bottom
C6 "CL03A105KP3NSNC" FP-CL03-IPC_C 13.524,12.691 r180 bottom
C7 "CL03A105KP3NSNC" FP-CL03-IPC_C 14.425,13.4 r0 bottom
C8 "C1005X5R0J475K050BC" FP-C1005-050-0_15-IPC_C 21.9,11.477 r90 bottom
C9 "GRM033Z71C104KE14D" FP-GRM033-0_03-IPC_C 17.9,10.429 r270 bottom
C10 "C1005X5R0J475K050BC" FP-C1005-050-0_15-IPC_C 18.075,12.475 r0 bottom
C11 "GRM033Z71C104KE14D" FP-GRM033-0_03-IPC_C 18.4,11.304 r90 bottom
C12 "CL03A105KP3NSNC" FP-CL03-IPC_C 17.612,0.425 r180 bottom
C13 "GRM033R61A225KE47D" FP-GRM033-0_09-IPC_C 21.3,3.275 r90 bottom
C14 "GRM033R61A225KE47D" FP-GRM033-0_09-IPC_C 20.5,3.2 r90 bottom
C15 "CL05A226MQ5QUNC" FP-CL746-IPC_C 15.5,4.075 r180 bottom
C16 "CL05A226MQ5QUNC" FP-CL746-IPC_C 13.8,4.496 r270 bottom
C17 "CL05A226MQ5QUNC" FP-CL746-IPC_C 13.1,4.496 r270 bottom
C18 "CL03A105KP3NSNC" FP-CL03-IPC_C 11.263,7.551 r0 bottom
C19 "GRM033Z71C104KE14D" FP-GRM033-0_03-IPC_C 11.283,9.045 r0 bottom
C20 "CL03A105KP3NSNC" FP-CL03-IPC_C 15.9,6.55 r0 bottom
C21 "GRM033Z71C104KE14D" FP-GRM033-0_03-IPC_C 15.9,5.9 r0 bottom
C22 "CL03A105KP3NSNC" FP-CL03-IPC_C 15.15,11.854 r90 bottom
C23 "CL03A105KP3NSNC" FP-CL03-IPC_C 16.95,10.675 r180 bottom
C24 "C1005X5R0J475K050BC" FP-C1005-050-0_15-IPC_C 16.775,10 r180 bottom
C25 "GRM033Z71C104KE14D" FP-GRM033-0_03-IPC_C 20.119,8.011 r0 bottom
C26 "GRM033Z71C104KE14D" FP-GRM033-0_03-IPC_C 18.4,10.054 r90 bottom
C27 "GRM033Z71C104KE14D" FP-GRM033-0_03-IPC_C 20.7,7.075 r0 bottom
C28 "GRM033Z71C104KE14D" FP-GRM033-0_03-IPC_C 21.7,7.525 r0 bottom
C29 "GRM033Z71C104KE14D" FP-GRM033-0_03-IPC_C 19.29,7.48 r270 bottom
C30 "GRM033Z71C104KE14D" FP-GRM033-0_03-IPC_C 20.332,8.796 r0 bottom
C31 "GRM033Z71C104KE14D" FP-GRM033-0_03-IPC_C 21.503,8.268 r0 bottom
C32 "CL05A106MP5NUNC" FP-CL05A106MP5NUNC-IPC_C 18.007,6.878 r90 bottom value=10uF
C33 "GRM033Z71C104KE14D" FP-GRM033-0_03-IPC_C 20.015,9.856 r180 bottom
C34 "GRM033Z71C104KE14D" FP-GRM033-0_03-IPC_C 19.017,6.227 r0 bottom
C35 "GRM033Z71C104KE14D" FP-GRM033-0_03-IPC_C 22.025,6.525 r270 bottom
C36 "GRM033Z71C104KE14D" FP-GRM033-0_03-IPC_C 19.825,6.4 r270 bottom
C37 "GRM033Z71C104KE14D" FP-GRM033-0_03-IPC_C 18.9,9.9 r90 bottom
C38 "GRM033Z71C104KE14D" FP-GRM033-0_03-IPC_C 21.702,8.846 r0 bottom
C39 "GRM033Z71C104KE14D" FP-GRM033-0_03-IPC_C 16.7,11.6 r270 bottom
C40 "CL05A226MQ5QUNC" FP-CL746-IPC_C 16.675,2.275 r180 bottom
C41 "CL05A226MQ5QUNC" FP-CL746-IPC_C 19.45,4.5 r90 bottom
C42 "CL05A226MQ5QUNC" FP-CL746-IPC_C 19.175,0.425 r0 bottom
C43 "CL05A226MQ5QUNC" FP-CL746-IPC_C 16.7,3.1 r180 bottom
C44 "CL05A106MP5NUNC" FP-CL05A106MP5NUNC-IPC_C 20.675,4.275 r0 bottom value=10uF
C46 "GRM033R71E332KA12D" FP-GRM033-0_03-IPC_C 17.95,5.6 r180 bottom
C47 "CL03A105KP3NSNC" FP-CL03-IPC_C 19.225,12.8 r270 bottom
C48 "GRM033Z71C104KE14D" FP-GRM033-0_03-IPC_C 20.75,12.779 r270 bottom
C49 "C1005X5R0J475K050BC" FP-C1005-050-0_15-IPC_C 15.925,9.05 r0 top
C50 "GRM033Z71C104KE14D" FP-GRM033-0_03-IPC_C 15,8.1 r270 top
C51 "CL03A105KP3NSNC" FP-CL03-IPC_C 26.317,9.525 r270 bottom
C52 "CL03A105KP3NSNC" FP-CL03-IPC_C 24.35,11.204 r90 top
C53 "CL03A105KP3NSNC" FP-CL03-IPC_C 11.276,7.046 r0 bottom
C54 "CL03A105KP3NSNC" FP-CL03-IPC_C 13.725,3.125 r90 bottom
C55 "C1005X5R0J475K050BC" FP-C1005-050-0_15-IPC_C 16.9,9.125 r180 bottom
C56 "GRM033Z71C104KE14D" FP-GRM033-0_03-IPC_C 17.325,9.375 r180 top
C57 "CL03A105KP3NSNC" FP-CL03-IPC_C 13.605,11.635 r0 bottom
C58 "GRM033Z71C104KE14D" FP-GRM033-0_03-IPC_C 25.1,12.25 r0 top
C59 "CL05A106MP5NUNC" FP-CL05A106MP5NUNC-IPC_C 21.1,13.925 r270 top value=10uF
C60 "GRM033Z71C104KE14D" FP-GRM033-0_03-IPC_C 24.975,14.275 r0 top
C61 "GRM033Z71C104KE14D" FP-GRM033-0_03-IPC_C 25.1,2.45 r270 top
C62 "GRM0335C1H111JA01D" FP-GRM033-0_03-IPC_C 18.6,14.35 r180 top
C63 "GRM0335C1H111JA01D" FP-GRM033-0_03-IPC_C 18.55,13.625 r270 top
C64 "CL03A105KP3NSNC" FP-CL03-IPC_C 7.546,7.1 r180 top
C65 "CL03A105KP3NSNC" FP-CL03-IPC_C 7.56,5.45 r0 top
C66 "GRM033R71C222KA88D" FP-GRM033-0_03-IPC_C 9.75,3.3 r180 top
C67 "GJM0335C1ER70BB01D" FP-GJM033-0_03-IPC_C 10.55,2.175 r180 top
C68 "DNF" FP-GRM033-0_03-MFG 11.05,0.625 r0 top
C69 "CL03A105KP3NSNC" FP-CL03-IPC_C 8.675,8.65 r180 top
C70 "CL03A105KP3NSNC" FP-CL03-IPC_C 8.675,7.5 r0 top
C71 "C1005X5R0J475K050BC" FP-C1005-050-0_15-IPC_C 8.966,9.267 r180 top
C72 "C1005X5R0J475K050BC" FP-C1005-050-0_15-IPC_C 10.335,9.177 r90 top
C73 "GRM033Z71C104KE14D" FP-GRM033-0_03-IPC_C 8.735,5.45 r180 top
C74 "CL03A105KP3NSNC" FP-CL03-IPC_C 8.65,8.075 r0 top
C75 "GRM033Z71C104KE14D" FP-GRM033-0_03-IPC_C 13.985,6.95 r270 top
C76 "GRM033Z71C104KE14D" FP-GRM033-0_03-IPC_C 13.925,3.8 r90 top
C77 "GRM033Z71C104KE14D" FP-GRM033-0_03-IPC_C 13.975,5.775 r90 top
C78 "GRM033Z71C104KE14D" FP-GRM033-0_03-IPC_C 8.725,4.85 r180 top
C79 "GRM033Z71C104KE14D" FP-GRM033-0_03-IPC_C 13.166,8.474 r180 top
C80 "GRM033Z71C104KE14D" FP-GRM033-0_03-IPC_C 11.95,3.25 r0 top
C81 "GRM033Z71C104KE14D" FP-GRM033-0_03-IPC_C 13.75,7.904 r270 bottom
C82 "GRM033Z71C104KE14D" FP-GRM033-0_03-IPC_C 13.063,9.939 r270 bottom
C83 "CL05A106MP5NUNC" FP-CL05A106MP5NUNC-IPC_C 13.457,9.139 r0 top value=10uF
C84 "CL03A105KP3NSNC" FP-CL03-IPC_C 15.925,7.2 r0 bottom
C85 "GRM033Z71C104KE14D" FP-GRM033-0_03-IPC_C 16.55,8.104 r270 bottom
C86 "GRM033Z71C104KE14D" FP-GRM033-0_03-IPC_C 18.025,8.329 r270 bottom
C87 "CL05A106MP5NUNC" FP-CL05A106MP5NUNC-IPC_C 17.2,7.8 r270 bottom value=10uF
C88 "GRM033Z71C104KE14D" FP-GRM033-0_03-IPC_C 17.45,7.75 r90 top
C89 "GRM033Z71C104KE14D" FP-GRM033-0_03-IPC_C 17.475,6.646 r270 top
C90 "GRM033Z71C104KE14D" FP-GRM033-0_03-IPC_C 22.1,13.029 r90 bottom
C91 "GRM21BR60G107ME11L" FP-GRM21B-0_2-e0_2_0_7-MFG 20.8,5.25 r180 top
C92 "CL03A105KP3NSNC" FP-CL03-IPC_C 26.495,2.418 r270 bottom
C94 "GRM033Z71C104KE14D" FP-GRM033-0_03-IPC_C 24.054,3.15 r0 top
C95 "CL03A105KP3NSNC" FP-CL03-IPC_C 16.525,5.5 r90 top
C96 "GRM033Z71C104KE14D" FP-GRM033-0_03-IPC_C 18.354,5.75 r0 top
C97 "CL03A105KP3NSNC" FP-CL03-IPC_C 14.6,11.829 r270 bottom
C98 "GRM033Z71C104KE14D" FP-GRM033-0_03-IPC_C 19.125,11.304 r270 bottom
C99 "GRM033Z71C104KE14D" FP-GRM033-0_03-IPC_C 21.225,11.275 r90 bottom
D1 "SML-LX0404SIUPGUSB" SML-LX0404SIUPGUSB 26.125,2.55 r0 top
D2 "TPD1E01B04DPYRQ1" TPD1E01B04DPYRQ1 18.207,13.677 r180 bottom
D3 "TPD1E01B04DPYRQ1" TPD1E01B04DPYRQ1 18.221,14.502 r180 bottom
D4 "NSR20F30NXT5G" ONSC-DSN-2-512AB-01_V 13.025,1.125 r180 top
E1 "NN03-320" NN03-320 0.8,8.25 r90 top
FID1 "TPP" TPP 42.95,26.8 r90 bottom
FID2 "TPP" TPP 33.275,8.975 r90 bottom
FID3 "TPP" TPP 4,19.025 r90 bottom
FID4 "TPP" TPP 48,7 r90 bottom
FID5 "TPP" TPP 4,19.025 r90 top
FID6 "TPP" TPP 42.25,15.25 r90 top
FID7 "TPP" TPP 32.45,1.15 r90 top
FID8 "TPP" TPP 48,7 r90 top
GAP1 "GAP9_MC" GAP9 19.7,7.975 r90 top
IC1 "MAX38643AENT+T" BGA6C40P3X2_142X89X50 15.2,3.15 r180 bottom
IC2 "TS5A3153YZPR" BGA8C50P2X4_89X189X50 14.675,7.6 r180 bottom
IC3 "TS5A3167YZPR" BGA5C50P2X3_89X139X50 23,2.5 r0 top
J1 "USB3076-30-A" CONN_USB3076-30-A_GCT 17.95,1.469 r0 top locked
J2 "DF40C-50DP-0.4V(51)" CONN_COMBI_50P 8.7,6.45 r0 bottom locked
J3 "3220-10-0100-00" 322010010000 46.5,16.5 r270 top
J4 "DF40C-40DP-0.4V(51)" FP-DF40C-40DP-0_4V_51-MFG 24.1,6.35 r270 bottom
J5 "505066-1222" 5050661222 7.888,12.089 r270 top
J6 "BHR-24-VUA" SHDR24W64P254_2X12_3808X880X910P 40.74,23.74 r180 top
J7 "3220-10-0100-00" 322010010000 37.98,11.54 r270 top
J8 "DF52-2S-0.8H(21)" DF522S08H21 23.595,5.975 r90 top locked
L1 "DFE18SAN1R0ME0L" FP-DFE18SAN_E0-MFG 15.225,4.95 r180 bottom
L2 "DFE201210S-1R5M=P2" IND_0805_DFE201210S 17.675,4.525 r180 bottom
L3 "LQM18DN100M70L" FP-LQM18DN_70-IPC_C 8.159,6.275 r0 top
L4 "LQP03HQ2N2B02D" FP-LQP03HQ_02-MFG 10.8,2.95 r270 top
L5 "LQP03HQ2N2B02D" FP-LQP03HQ_02-MFG 10.8,1.375 r270 top
L6 "LQW15AN1N6C80D" FP-LQW15AN_80-MFG 9.6,0.65 r180 top
L7 "DFE201610E-4R7M=P2" FP-DFE201610C-MFG 16.2,7.4 r90 top
L8 "LQW18AN4N2G80D" FP-LQW18AN_80-MFG#1 6.375,0.65 r180 top
L9 "LQW18AN7N5G80D" FP-LQW18AN_80-MFG#2 8.05,1.35 r270 top
L10 "LQM18DN100M70L" FP-LQM18DN_70-IPC_C 7.426,8.544 r90 top
MIC1 "MMICT5838-00-012" MMICT5838-00-012 24.346,13.25 r180 bottom
R1 "CRCW04021R00FKEDHP" RESC1005X40X25LL05T10 14.224,4.833 r0 top value="1 Ohm"
R2 "CRCW020120K0FKED" RESC0603X28X15LL05T05 15.625,1.9 r90 bottom
R3 "CRCW04021R00FKEDHP" RESC1005X40X25LL05T10 21.025,14.35 r0 bottom value="1 Ohm"
R4 "CRCW0201220RFKED" RESC0603X28X15NL05T05 7.75,21.5 r270 top value=220R
R5 "CRCW04021R00FKEDHP" RESC1005X40X25LL05T10 16.9,6.2 r90 bottom value="1 Ohm"
R6 "RC0201FR-07100KL" RESC0201(0603)_L 20.35,1.925 r270 bottom value=100k
R7 "RC0201FR-07100KL" RESC0201(0603)_L 20.35,0.725 r90 bottom value=100k
R8 "CRCW04021R00FKEDHP" RESC1005X40X25LL05T10 16.85,13.05 r90 bottom value="1 Ohm"
R9 "RMCF0201FT10K0" FP-RMCF0201-IPC_C 15.625,0.725 r90 bottom
R10 "CRCW04021R00FKEDHP" RESC1005X40X25LL05T10 21.425,13.15 r270 bottom value="1 Ohm"
R11 "ERJ-1GNJ105C" RESC0201(0603)_L 15.963,12.575 r180 bottom value=1M
R12 "ERJ-1GNJ105C" RESC0201(0603)_L 26.325,8.175 r90 bottom value=1M
R13 "ERJ-1GNJ105C" RESC0201(0603)_L 22.1,14.225 r270 bottom value=1M
R14 "RR0510P-104-D" FP-RR0510-IPC_C 12.775,13.751 r0 bottom
R15 "RR0510P-104-D" FP-RR0510-IPC_C 12.769,14.513 r0 bottom
R16 "DNM" 0201 19.175,5.45 r90 top
R17 "ERJ-1GNJ105C" RESC0201(0603)_L 22.093,3.72 r270 bottom value=1M
R19 "ERJ-1GNF4990C" RESC0603X26X15LL03T05 19.525,14.225 r0 bottom
R20 "ERJ-1GNF4990C" RESC0603X26X15LL03T05 19.5,13.675 r0 bottom
R21 "DNF" FP-RMCF0201-IPC_C 26.5,12.221 r270 bottom locked
R22 "RC0201FR-07100KL" RESC0201(0603)_L 26.305,10.825 r90 bottom value="100000.00 Ohm"
R23 "RMCF0201ZT0R00" FP-RMCF0201-IPC_C 26.5,13.225 r270 bottom locked
R24 "RMCF0201FT10K0" FP-RMCF0201-IPC_C 10.8,2.967 r90 bottom
R25 "RC0201FR-072R2L" RESC0201(0603)_L 9.45,9.889 r180 top value=2.2R
R26 "RMCF0201FT10K0" FP-RMCF0201-IPC_C 13.446,6.025 r180 bottom
R27 "RMCF0201FT10K0" FP-RMCF0201-IPC_C 13.429,6.525 r180 bottom
R28 "RMCF0201FT10K0" FP-RMCF0201-IPC_C 13.425,7.05 r180 bottom
R29 "RMCF0201FT10K0" FP-RMCF0201-IPC_C 13.425,5.525 r180 bottom
R30 "DNF" FP-RMCF0201-IPC_C 9.689,10.434 r180 top
R31 "RMCF0201FT10K0" FP-RMCF0201-IPC_C 14.5,8.979 r270 top
R32 "ERJ-1GNJ105C" RESC0201(0603)_L 18.4,5.175 r180 top value=1M
R33 "RMCF0402ZT0R00" FP-RMCF0402-IPC_C 19.9,14.125 r0 top
R34 "RMCF0402ZT0R00" FP-RMCF0402-IPC_C 19.575,13.425 r0 top
R35 "CRCW020149R9FNED" RESC0603X28X15ML05T05 7.669,13.958 r0 bottom
R36 "CRCW0201220RFKED" RESC0603X28X15NL05T05 35,14.625 r90 top value=220R
R37 "CRCW0201220RFKED" RESC0603X28X15NL05T05 35,12.625 r90 top value=220R
R38 "CRCW0201220RFKED" RESC0603X28X15NL05T05 35,10.625 r90 top value=220R
R39 "RK73B1JTTD562J" RESC1608X55X30ML20T10 36,1 r0 top
R40 "CRCW0201220RFKED" RESC0603X28X15NL05T05 35,8.625 r90 top value=220R
R41 "DNM" RESC1608X55X30ML20T10 39,1 r180 top
R42 "CRCW0201220RFKED" RESC0603X28X15NL05T05 35,6.625 r90 top value=220R
R43 "CRCW0201220RFKED" RESC0603X28X15NL05T05 35,4.625 r90 top value=220R
R44 "CRCW020149R9FNED" RESC0603X28X15ML05T05 9.916,11.085 r180 top
R45 "CRCW020149R9FNED" RESC0603X28X15ML05T05 9.91,11.658 r180 top
R46 "CRCW020149R9FNED" RESC0603X28X15ML05T05 9.918,12.242 r0 top
R47 "CRCW020149R9FNED" RESC0603X28X15ML05T05 7.668,13.359 r0 bottom
R48 "CRCW020149R9FNED" RESC0603X28X15ML05T05 7.7,12.674 r180 bottom
R49 "CRCW0201220RFKED" RESC0603X28X15NL05T05 6.75,21.5 r270 top value=220R
R50 "CRCW0201220RFKED" RESC0603X28X15NL05T05 5.75,21.5 r270 top value=220R
RT1 "ERT-JZEG103FA" ERTJZEG103FA 16.412,0.425 r0 bottom
S1 "NanoT160BP" NanoT160BP 23,0.85 r0 top locked
SW3 "PTS815 SJM 250 SMTR LFS" "SW4_PTS815 SJM 250 SMTR LFS_CNK" 32.5,12.5 r90 top
SW4 "PTS815 SJM 250 SMTR LFS" "SW4_PTS815 SJM 250 SMTR LFS_CNK" 32.5,5 r90 top
U1 "MX25UM51345GBEI00" MX25UM51345GBEI00 14.225,12.375 r90 top
U2 "APS512XXN-OB9-WB" WLCSP32_APS512XXN-OB9-WB 19.675,11.475 r180 top locked
U3 "MAX77654BENV+T" WLP_30_MAX77654 19.55,1.275 r90 bottom
U4 "TPS22916CYFPR" BGA4C40P2X2_78X78X50 11.283,8.299 r270 bottom
U5 "NRF5340-CLAA-R7" NRF5340_WLCSP 11.5,5.85 r90 top locked
U6 "TPS22916CYFPR" BGA4C40P2X2_78X78X50 14.7,6.025 r180 bottom
U7 "TPS22916CYFPR" BGA4C40P2X2_78X78X50 15.919,11.768 r180 bottom
U8 "TPS22916CYFPR" BGA4C40P2X2_78X78X50 20,12.775 r180 bottom
U9 "TMUX1112RSVR" FP-RSV0016A-MFG 25.65,9.65 r0 top
U10 "TMUX1112RSVR" FP-RSV0016A-MFG 23.025,9.65 r0 top
U11 "TMUX1112RSVR" FP-RSV0016A-MFG 11.6,5.138 r180 bottom
U12 "TMUX1112RSVR" FP-RSV0016A-MFG 12.267,1.789 r0 bottom
U13 "TMUX1112RSVR" FP-RSV0016A-MFG 11.71,11.384 r0 bottom
U15 "IS31FL3194-CLS2-TR" WLCSP_8_P0.4 23.975,2.6 r0 top
U16 "74AUP1G32GX,125" SOT1226-3 20.032,11.525 r90 bottom
U17 "APS12804O-SQRH-WA" APS12804O-SQRH-WA 14.7,9.95 r180 bottom
U18 "TPS22916CYFPR" BGA4C40P2X2_78X78X50 15.775,7.975 r180 bottom
U19 "PESD1USB30Z" WLCSP_5_2-1-2_P0.4 15.575,4.95 r180 top
U20 "TPS22916CYFPR" BGA4C40P2X2_78X78X50 17.35,5.5 r180 top
U21 "LSM6DSV16BXTR" FP-LGA-14L-DM00747677-MFG 23.05,13.1 r90 top
Y2 "ECS-240-10-47Q-CES-TR" XTAL_ECS-240-10-47Q-CES-TR 20.925,5.725 r90 bottom
Y3 "ECS-320-7-48B-JTM-TR5" Y_ECX-1048 8.3,3.875 r0 top
Y4 "ECS-.327-9-1210-TR" FP-ECX-1210-MFG 11.531,8.839 r180 top

## Footprints (in the part's own frame and the unit in brackets; to place one, negate y for a bottom-side part, rotate by r counter-clockwise, add the part's x,y. Pads: shape width x height; smd on the part's side, far side on the other; paste and mask are expansions set on the pad)
0201 [mm]
  rect 0.354x0.263 smd paste+0 mask+0: 1(-0.254,0) 2(0.254,0)
  body extent -0.3,-0.15 0.3,0.15, height 0.26
5050661222 [mm]
  rect 0.18x0.4 smd: 1(-0.875,-0.95) 2(-0.875,0.95) 3(-0.525,-0.95) 4(-0.525,0.95) 5(-0.175,-0.95) 6(-0.175,0.95) 7(0.175,-0.95) 8(0.175,0.95) 9(0.525,-0.95) 10(0.525,0.95) 11(0.875,-0.95) 12(0.875,0.95)
  rect 0.4x0.385 smd: MP1(-2.155,-0.482) MP2(-2.155,0.482) MP3(2.155,-0.482) MP4(2.155,0.482)
  silkscreen extent -2.3,-1 2.3,1, body extent -2.27,-1 2.27,1, height 0.56
322010010000 [mm]
  round 1.07 hole 0.7: 1(0,0) 2(0,1.27) 3(1.27,0) 4(1.27,1.27) 5(2.54,0) 6(2.54,1.27) 7(3.81,0) 8(3.81,1.27) 9(5.08,0) 10(5.08,1.27)
  silkscreen extent -4.4,-0.05 -4.3,0.05, body extent -3.87,-1.99 8.95,3.25, height 5.63
APS12804O-SQRH-WA [mm]
  round 0.19 smd paste+0 mask+0: A1(-0.525,0.525) A2(-0.175,0.525) A3(0.175,0.525) A4(0.525,0.525) B1(-0.525,0.175) B2(-0.175,0.175) B3(0.175,0.175) B4(0.525,0.175) C1(-0.525,-0.175) C2(-0.175,-0.175) C3(0.175,-0.175) C4(0.525,-0.175) D1(-0.525,-0.525) D2(-0.175,-0.525) D3(0.175,-0.525)
  silkscreen extent -1.11,-1.09 1.08,1.11
BGA4C40P2X2_78X78X50 [mm]
  round 0.226 smd: A1(-0.2,0.2) A2(0.2,0.2) B1(-0.2,-0.2) B2(0.2,-0.2)
  body extent -0.39,-0.39 0.39,0.39, height 0.5
BGA5C50P2X3_89X139X50 [mm]
  round 0.226 smd: A1(-0.25,0.5) A2(0.25,0.5) B1(-0.25,0) C1(-0.25,-0.5) C2(0.25,-0.5)
  body extent -0.44,-0.69 0.44,0.69, height 0.5
BGA6C40P3X2_142X89X50 [mm]
  round 0.216 smd: A1(-0.4,0.2) A2(0,0.2) A3(0.4,0.2) B1(-0.4,-0.2) B2(0,-0.2) B3(0.4,-0.2)
  body extent -0.71,-0.44 0.71,0.44, height 0.5
BGA8C50P2X4_89X189X50 [mm]
  round 0.226 smd: A1(-0.25,0.75) A2(0.25,0.75) B1(-0.25,0.25) B2(0.25,0.25) C1(-0.25,-0.25) C2(0.25,-0.25) D1(-0.25,-0.75) D2(0.25,-0.75)
  body extent -0.44,-0.94 0.44,0.94, height 0.5
CAPC6333_33N_KEM-L [mm]
  rect 0.332x0.279 smd paste+0 mask+0: 1(-0.251,0) 2(0.251,0)
  body extent -0.32,-0.17 0.32,0.17, height 0.33
CONN_COMBI_50P [mm] "50Pin 0.4mm pitch connector footprint that accepts (male) connectors intended for different stacking heights:  Hirose - DF40C-50DP-0.4V(51) for 1.5mm - 3mm stacking height , JAE - WP7B-P050VA1-R8000 - for 0.7mm stacking height"
  rect 0.66x0.22 smd: 1(1.355,4.8) 2(1.355,4.4) 3(1.355,4) 4(1.355,3.6) 5(1.355,3.2) 6(1.355,2.8) 7(1.355,2.4) 8(1.355,2) 9(1.355,1.6) 10(1.355,1.2) 11(1.355,0.8) 12(1.355,0.4) 13(1.355,0) 14(1.355,-0.4) 15(1.355,-0.8) 16(1.355,-1.2) 17(1.355,-1.6) 18(1.355,-2) 19(1.355,-2.4) 20(1.355,-2.8) 21(1.355,-3.2) 22(1.355,-3.6) 23(1.355,-4) 24(1.355,-4.4) 25(1.355,-4.8) 26(-1.355,-4.8) 27(-1.355,-4.4) 28(-1.355,-4) 29(-1.355,-3.6) 30(-1.355,-3.2) 31(-1.355,-2.8) 32(-1.355,-2.4) 33(-1.355,-2) 34(-1.355,-1.6) 35(-1.355,-1.2) 36(-1.355,-0.8) 37(-1.355,-0.4) 38(-1.355,0) 39(-1.355,0.4) 40(-1.355,0.8) 41(-1.355,1.2) 42(-1.355,1.6) 43(-1.355,2) 44(-1.355,2.4) 45(-1.355,2.8) 46(-1.355,3.2) 47(-1.355,3.6) 48(-1.355,4) 49(-1.355,4.4) 50(-1.355,4.8)
  rect 0.65x0.35 smd: 56(-1.375,-5.275) 56(-1.375,5.275) 56(1.325,-5.275) 56(1.325,5.275)
  body extent -1.49,-5.74 1.48,5.78, height 1.14
CONN_USB3076-30-A_GCT [mm]
  rect 0.406x1.397 smd paste+0 mask+0: 1(-1.3,2.631) 2(-0.65,2.631) 3(0,2.631) 4(0.65,2.631) 5(1.3,2.631)
  rect 1.143x1.448 smd paste-0.724 mask-0.724: 6(-2.32,2.211) 7(2.32,2.211)
  rect 1.75x1.9 smd paste-0.95 mask-0.953: 8(-1.125,-0.019) 9(1.125,-0.019)
  oval 0.85x1.75 hole 0.45 slot 1.25 at 90 deg mask+0.102: 10(-3.575,-0.019) 11(3.575,-0.019)
  body extent -3.7,-2.78 3.7,2.78, height 2.67
DF522S08H21 [mm]
  rect 0.5x1 smd: 1(-0.4,0.89) 2(0.4,0.89)
  rect 0.9x1.6 smd: 3(-1.65,-1.03) 4(1.65,-1.03)
  silkscreen extent -1.9,-1.74 1.9,1.03, body extent -2.01,-1.74 2.01,1.34, height 1.1
ERTJZEG103FA [mm]
  rect 0.275x0.25 smd: 1(-0.263,0) 2(0.263,0)
  body extent -0.3,-0.15 0.3,0.15, height 0.33
FP-C1005-050-0_15-IPC_C [mm]
  rect 0.605x0.56 smd paste+0 mask+0: 1(-0.377,0) 2(0.377,0)
  body extent -0.5,-0.25 0.5,0.25, height 0.55
FP-CL03-IPC_C [mm]
  rect 0.354x0.263 smd paste+0 mask+0: 1(-0.254,0) 2(0.254,0)
  body extent -0.3,-0.15 0.3,0.15, height 0.33
FP-CL05A106MP5NUNC-IPC_C [mm]
  rect 0.656x0.606 smd paste+0 mask+0: 1(-0.375,0) 2(0.375,0)
  body extent -0.5,-0.25 0.5,0.25, height 0.7
FP-CL746-IPC_C [mm]
  rect 0.515x0.472 smd paste+0 mask+0: 1(-0.379,0) 2(0.379,0)
  body extent -0.5,-0.25 0.5,0.25, height 0.55
FP-DF40C-40DP-0_4V_51-MFG [mm]
  rect 0.23x0.66 smd paste-1000 mask+0: 1(-3.8,-1.355) 2(-3.8,1.355) 3(-3.4,-1.355) 4(-3.4,1.355) 5(-3,-1.355) 6(-3,1.355) 7(-2.6,-1.355) 8(-2.6,1.355) 9(-2.2,-1.355) 10(-2.2,1.355) 11(-1.8,-1.355) 12(-1.8,1.355) 13(-1.4,-1.355) 14(-1.4,1.355) 15(-1,-1.355) 16(-1,1.355) 17(-0.6,-1.355) 18(-0.6,1.355) 19(-0.2,-1.355) 20(-0.2,1.355) 21(0.2,-1.355) 22(0.2,1.355) 23(0.6,-1.355) 24(0.6,1.355) 25(1,-1.355) 26(1,1.355) 27(1.4,-1.355) 28(1.4,1.355) 29(1.8,-1.355) 30(1.8,1.355) 31(2.2,-1.355) 32(2.2,1.355) 33(2.6,-1.355) 34(2.6,1.355) 35(3,-1.355) 36(3,1.355) 37(3.4,-1.355) 38(3.4,1.355) 39(3.8,-1.355) 40(3.8,1.355)
  rect 0.35x0.66 smd paste+0 mask+0: 41(-4.275,1.355) 42(4.275,1.355) 43(-4.275,-1.355) 44(4.275,-1.355)
  body extent -4.76,-1.49 4.76,1.49, height 1.29
FP-DFE18SAN_E0-MFG [mm]
  rect 0.55x1 smd paste+0 mask+0: 1(-0.625,0) 2(0.625,0)
  body extent -0.8,-0.4 0.8,0.4, height 0.8
FP-DFE201610C-MFG [mm]
  rect 0.8x1.8 smd paste+0 mask+0: 1(-0.8,0) 2(0.8,0)
  body extent -1,-0.8 1,0.8, height 1
FP-ECX-1210-MFG [mm]
  rect 0.575x1.14 smd paste+0 mask+0: 1(-0.413,0) 2(0.413,0)
  body extent -0.8,-0.67 0.8,0.67, height 0.25
FP-GJM033-0_03-IPC_C [mm]
  rect 0.354x0.263 smd paste+0 mask+0: 1(-0.254,0) 2(0.254,0)
  body extent -0.53,-0.27 0.53,0.26, height 0.25
FP-GRM21B-0_2-e0_2_0_7-MFG [mm]
  rect 0.7x1.3 smd paste+0 mask+0: 1(-0.95,0) 2(0.95,0)
  body extent -1,-0.63 1,0.63, height 1.45
FP-GRM033-0_03-IPC_C [mm]
  rect 0.354x0.263 smd paste+0 mask+0: 1(-0.254,0) 2(0.254,0)
  body extent -0.3,-0.15 0.3,0.15, height 0.33
FP-GRM033-0_03-MFG [mm]
  rect 0.25x0.3 smd paste+0 mask+0: 1(-0.238,0) 2(0.238,0)
  body extent -0.46,-0.27 0.46,0.27, height 0.25
FP-GRM033-0_09-IPC_C [mm]
  rect 0.377x0.303 smd paste+0 mask+0: 1(-0.263,0) 2(0.263,0)
  body extent -0.3,-0.15 0.3,0.15, height 0.39
FP-GRM035-0_09-IPC_C [mm]
  rect 0.377x0.303 smd paste+0 mask+0: 1(-0.263,0) 2(0.263,0)
  body extent -0.3,-0.15 0.3,0.15, height 0.55
FP-LGA-14L-DM00747677-MFG [mm]
  rect 0.575x0.35 smd paste-1000 mask+0: 1(-1.162,0.75) 2(-1.162,0.25) 3(-1.162,-0.25) 4(-1.162,-0.75) 8(1.162,-0.75) 9(1.162,-0.25) 10(1.162,0.25) 11(1.162,0.75)
  rect 0.35x0.575 smd paste-1000 mask+0: 5(-0.5,-0.913) 6(0,-0.913) 7(0.5,-0.913) 12(0.5,0.913) 13(0,0.913) 14(-0.5,0.913)
  body extent -2.02,-1.78 2.02,1.78, height 0.25
FP-LQM18DN_70-IPC_C [mm]
  rect 0.906x0.858 smd paste+0 mask+0: 1(-0.576,0) 2(0.576,0)
  body extent -1.13,-0.58 1.13,0.58, height 0.25
FP-LQP03HQ_02-MFG [mm]
  rect 0.3x0.275 smd paste+0 mask+0: 1(-0.3,0) 2(0.3,0)
  body extent -0.55,-0.27 0.55,0.26, height 0.25
FP-LQW15AN_80-MFG [mm]
  rect 0.7x1 smd paste+0 mask+0: 1(-0.505,0) 2(0.505,0)
  body extent -0.81,-0.45 0.81,0.45, height 0.25
FP-LQW18AN_80-MFG#1 [mm]
  rect 0.5x1 smd paste+0 mask+0: 1(-0.715,0) 2(0.715,0)
  body extent -1.1,-0.67 1.1,0.67, height 0.25
FP-LQW18AN_80-MFG#2 [mm]
  rect 0.57x1 smd paste+0 mask+0: 1(-0.715,0) 2(0.715,0)
  body extent -1.1,-0.67 1.1,0.67, height 0.25
FP-RMCF0201-IPC_C [mm]
  rect 0.354x0.263 smd paste+0 mask+0: 1(-0.254,0) 2(0.254,0)
  body extent -0.3,-0.15 0.3,0.15, height 0.26
FP-RMCF0402-IPC_C [mm]
  rect 0.581x0.472 smd paste+0 mask+0: 1(-0.366,0) 2(0.366,0)
  body extent -0.76,-0.38 0.76,0.38, height 0.25
FP-RR0510-IPC_C [mm]
  rect 0.468x0.472 smd paste+0 mask+0: 1(-0.402,0) 2(0.402,0)
  body extent -0.5,-0.25 0.5,0.25, height 0.4
FP-RSV0016A-MFG [mm]
  rrect50% 0.7x0.2 smd paste+0 mask+0: 1(-0.75,0.6)
  rrect50% 0.6x0.2 smd paste+0 mask+0: 2(-0.8,0.2) 3(-0.8,-0.2) 4(-0.8,-0.6) 9(0.8,-0.6) 10(0.8,-0.2) 11(0.8,0.2) 12(0.8,0.6)
  rrect50% 0.2x0.6 smd paste+0 mask+0: 5(-0.6,-1.2) 6(-0.2,-1.2) 7(0.2,-1.2) 8(0.6,-1.2) 13(0.6,1.2) 14(0.2,1.2) 15(-0.2,1.2) 16(-0.6,1.2)
  body extent -1.2,-1.6 1.2,1.6, height 0.25
GAP9 [mm]
  round 0.185 smd paste-0.005 mask+0: A1(-1.575,1.575) A2(-1.225,1.575) A3(-0.875,1.575) A4(-0.525,1.575) A7(0.525,1.575) A8(0.875,1.575) A9(1.225,1.575) A10(1.575,1.575) B1(-1.575,1.225) B2(-1.225,1.225) B3(-0.875,1.225) B4(-0.525,1.225) B5(-0.175,1.225) B6(0.175,1.225) B7(0.525,1.225) B8(0.875,1.225) B9(1.225,1.225) B10(1.575,1.225) C1(-1.575,0.875) C2(-1.225,0.875) C3(-0.875,0.875) C4(-0.525,0.875) C5(-0.175,0.875) C6(0.175,0.875) C7(0.525,0.875) C8(0.875,0.875) C9(1.225,0.875) C10(1.575,0.875) D1(-1.575,0.525) D2(-1.225,0.525) D3(-0.875,0.525) D4(-0.525,0.525) D5(-0.175,0.525) D6(0.175,0.525) D7(0.525,0.525) D8(0.875,0.525) D9(1.225,0.525) D10(1.575,0.525) E1(-1.575,0.175) E2(-1.225,0.175) E3(-0.875,0.175) E4(-0.525,0.175) E5(-0.175,0.175) E6(0.175,0.175) E7(0.525,0.175) E8(0.875,0.175) E9(1.225,0.175) E10(1.575,0.175) F1(-1.575,-0.175) F2(-1.225,-0.175) F3(-0.875,-0.175) F4(-0.525,-0.175) F5(-0.175,-0.175) F6(0.175,-0.175) F7(0.525,-0.175) F8(0.875,-0.175) F9(1.225,-0.175) F10(1.575,-0.175) G1(-1.575,-0.525) G2(-1.225,-0.525) G3(-0.875,-0.525) G4(-0.525,-0.525) G5(-0.175,-0.525) G6(0.175,-0.525) G7(0.525,-0.525) G8(0.875,-0.525) G9(1.225,-0.525) G10(1.575,-0.525) H1(-1.575,-0.875) H2(-1.225,-0.875) H3(-0.875,-0.875) H4(-0.525,-0.875) H5(-0.175,-0.875) H6(0.175,-0.875) H7(0.525,-0.875) H8(0.875,-0.875) H9(1.225,-0.875) H10(1.575,-0.875) J1(-1.575,-1.225) J2(-1.225,-1.225) J3(-0.875,-1.225) J4(-0.525,-1.225) J5(-0.175,-1.225) J6(0.175,-1.225) J7(0.525,-1.225) J8(0.875,-1.225) J9(1.225,-1.225) J10(1.575,-1.225) K1(-1.575,-1.575) K2(-1.225,-1.575) K3(-0.875,-1.575) K4(-0.525,-1.575) K5(-0.175,-1.575) K6(0.175,-1.575) K7(0.525,-1.575) K8(0.875,-1.575) K9(1.225,-1.575) K10(1.575,-1.575)
  silkscreen extent -1.85,-1.85 1.85,1.85, body extent -1.85,-1.85 1.85,1.85, height 0.52
IND_0805_DFE201210S [mm] "0805 Inductor"
  rect 0.8x1.4 smd: 1(-0.8,0) 2(0.8,0)
  body extent -1,-0.64 1,0.64, height 1.02
MMICT5838-00-012 [mm]
  rect 0.522x0.725 smd paste-0.368 mask-0.368: 1(1.37,0.837) 2(0.548,0.837) 6(0.548,-0.837) 7(1.37,-0.837)
  rect 0.051x0.051 smd paste-0.025 mask-0.025: 3(-1.37,0)
  round 0.991 / inner round 1.524 / far side round 0.991 hole 0.991 unplated paste-0.495 mask-0.495: 3(-0.704,0)
  rect 0.3x0.3 smd paste-0.368 mask-0.368: 4(-1.444,1.025) 5(-1.444,-1.025)
  Top Sig/Pwr region: -0.185,0.045 0.106,0.071 0.109,0 0.069,-0.251 -0.046,-0.478 -0.226,-0.658 -0.452,-0.773 -0.704,-0.813 -0.955,-0.773 -1.181,-0.658 -1.361,-0.478 -1.477,-0.251 -1.516,0 -1.513,0.071 -1.222,0.045 -1.224,0 -1.199,-0.161 -1.125,-0.306 -1.01,-0.421 -0.865,-0.495 -0.704,-0.521 -0.543,-0.495 -0.398,-0.421 -0.282,-0.306 -0.208,-0.161 -0.183,0
  Top Sig/Pwr region: -0.185,-0.045 0.106,-0.071 0.109,0 0.069,0.251 -0.046,0.478 -0.226,0.658 -0.452,0.773 -0.704,0.813 -0.955,0.773 -1.181,0.658 -1.361,0.478 -1.477,0.251 -1.516,0 -1.513,-0.071 -1.222,-0.045 -1.224,0 -1.199,0.161 -1.125,0.306 -1.01,0.421 -0.865,0.495 -0.704,0.521 -0.543,0.495 -0.398,0.421 -0.282,0.306 -0.208,0.161 -0.183,0
  body extent -1.74,-1.33 1.76,1.33, height 0.97
MX25UM51345GBEI00 [mm] "WLCSP 68 512 Mbit Flash"
  round 0.25 smd mask-0.02: A1(-2.2,2.8) A12(2.2,2.8) B1(-2.2,2.4) B12(2.2,2.4) D3(-1.4,1.6) D5(-0.6,1.6) D7(0.2,1.6) D9(1,1.6) D11(1.8,1.6) E2(-1.8,1.2) E4(-1,1.2) E6(-0.2,1.2) E8(0.6,1.2) E10(1.4,1.2) F3(-1.4,0.8) F5(-0.6,0.8) F6(-0.2,0.8) F7(0.2,0.8) F8(0.6,0.8) F9(1,0.8) F11(1.8,0.8) G2(-1.8,0.4) G4(-1,0.4) G5(-0.6,0.4) G6(-0.2,0.4) G7(0.2,0.4) G8(0.6,0.4) G9(1,0.4) G10(1.4,0.4) H3(-1.4,0) H4(-1,0) H5(-0.6,0) H6(-0.2,0) H7(0.2,0) H8(0.6,0) H9(1,0) H11(1.8,0) J2(-1.8,-0.4) J4(-1,-0.4) J5(-0.6,-0.4) J6(-0.2,-0.4) J7(0.2,-0.4) J8(0.6,-0.4) J9(1,-0.4) J10(1.4,-0.4) K3(-1.4,-0.8) K4(-1,-0.8) K5(-0.6,-0.8) K6(-0.2,-0.8) K7(0.2,-0.8) K8(0.6,-0.8) K9(1,-0.8) K11(1.8,-0.8) L2(-1.8,-1.2) L4(-1,-1.2) L6(-0.2,-1.2) L8(0.6,-1.2) L10(1.4,-1.2) M2(-1.8,-1.6) M3(-1.4,-1.6) M5(-0.6,-1.6) M7(0.2,-1.6) M9(1,-1.6) M11(1.8,-1.6) P1(-2.2,-2.4) P12(2.2,-2.4) R1(-2.2,-2.8) R12(2.2,-2.8)
  silkscreen extent -2.7,-3.3 2.2,3.3, body extent -2.65,-3.25 2.68,3.25, height 0.51
NanoT160BP [mm]
  round 1.1 hole 0.6: 1(0,0) 2(2.4,0)
  body extent 0.05,-1.5 2.35,0.15, height 0.46
NN03-320 [mm]
  rect 1x1.2 smd: 1(-6.5,-0.6)
  rect 0.5x1.2 smd: 2(-5.25,-0.6) 3(-5.25,-2.4)
  rect 1x1 smd: 4(-0.5,-1.5)
  body extent -7,-3 0,0, height 2.01
NRF5340_WLCSP [mm]
  round 0.19 smd paste+0 mask+0: A1(-1.925,1.75) A2(-1.575,1.75) A3(-1.225,1.75) A5(-0.525,1.75) A7(0.175,1.75) A9(0.875,1.75) A11(1.575,1.75) A12(1.925,1.75) B1(-1.925,1.4) B2(-1.575,1.4) B4(-0.875,1.4) B5(-0.525,1.4) B6(-0.175,1.4) B7(0.175,1.4) B8(0.525,1.4) B9(0.875,1.4) B10(1.225,1.4) B11(1.575,1.4) B12(1.925,1.4) C2(-1.575,1.05) C4(-0.875,1.05) C5(-0.525,1.05) C6(-0.175,1.05) C7(0.175,1.05) C8(0.525,1.05) C9(0.875,1.05) C10(1.225,1.05) C11(1.575,1.05) D1(-1.925,0.7) D2(-1.575,0.7) D10(1.225,0.7) D11(1.575,0.7) D12(1.925,0.7) E2(-1.575,0.35) E3(-1.225,0.35) E4(-0.875,0.35) E5(-0.525,0.35) E6(-0.175,0.35) E7(0.175,0.35) E8(0.525,0.35) E10(1.225,0.35) E11(1.575,0.35) F1(-1.925,0) F2(-1.575,0) F3(-1.225,0) F5(-0.525,0) F6(-0.175,0) F7(0.175,0) F8(0.525,0) F10(1.225,0) F11(1.575,0) F12(1.925,0) G2(-1.575,-0.35) G3(-1.225,-0.35) G5(-0.525,-0.35) G6(-0.175,-0.35) G7(0.175,-0.35) G8(0.525,-0.35) G10(1.225,-0.35) G11(1.575,-0.35) H1(-1.925,-0.7) H2(-1.575,-0.7) H3(-1.225,-0.7) H10(1.225,-0.7) H11(1.575,-0.7) H12(1.925,-0.7) J2(-1.575,-1.05) J3(-1.225,-1.05) J4(-0.875,-1.05) J5(-0.525,-1.05) J6(-0.175,-1.05) J7(0.175,-1.05) J8(0.525,-1.05) J9(0.875,-1.05) J10(1.225,-1.05) J11(1.575,-1.05) K1(-1.925,-1.4) K2(-1.575,-1.4) K3(-1.225,-1.4) K4(-0.875,-1.4) K5(-0.525,-1.4) K6(-0.175,-1.4) K7(0.175,-1.4) K8(0.525,-1.4) K9(0.875,-1.4) K10(1.225,-1.4) K11(1.575,-1.4) K12(1.925,-1.4) L1(-1.925,-1.75) L3(-1.225,-1.75) L5(-0.525,-1.75) L7(0.175,-1.75) L9(0.875,-1.75) L11(1.575,-1.75) L12(1.925,-1.75)
  silkscreen extent -2.27,-2.07 2.27,2.06, body extent -2.18,-1.98 2.18,1.98, height 0.5
ONSC-DSN-2-512AB-01_V [mm] "DSN, 2-Leads, Body 1.6x0.8mm"
  rect 0.7x0.52 smd: 1(0,0.64)
  rect 0.7x1.05 smd: 2(0,-0.275)
  body extent -0.4,-0.8 0.4,0.8, height 0.31
RESC0201(0603)_L [mm] "Chip Resistor, Body 0.6x0.3mm, IPC High Density"
  rect 0.35x0.35 smd: 1(-0.3,0) 2(0.3,0)
  body extent -0.31,-0.16 0.31,0.16, height 0.3
RESC0603X26X15LL03T05 [mm] "Chip Resistor, 2-Leads, Body 0.60x0.30mm, IPC High Density"
  rect 0.35x0.25 smd: 1(-0.275,0) 2(0.275,0)
  body extent -0.32,-0.16 0.31,0.17, height 0.26